# Altium PCB LTO 16S BMS.PcbDoc (part 1 of 2)
Units mm, origin at the board's own origin, x right, y up, seen from the top; angles counter-clockwise.
Board outline 100 x 100 mm, 4 copper layers (L1 - Primary, L2 - GND, L3 - GND, L4 - Secondary), stack 1.685 mm thick; 254 components, 145 nets, 666 pads, 230 vias.
Unrouted connection lines stored in the file: 137.
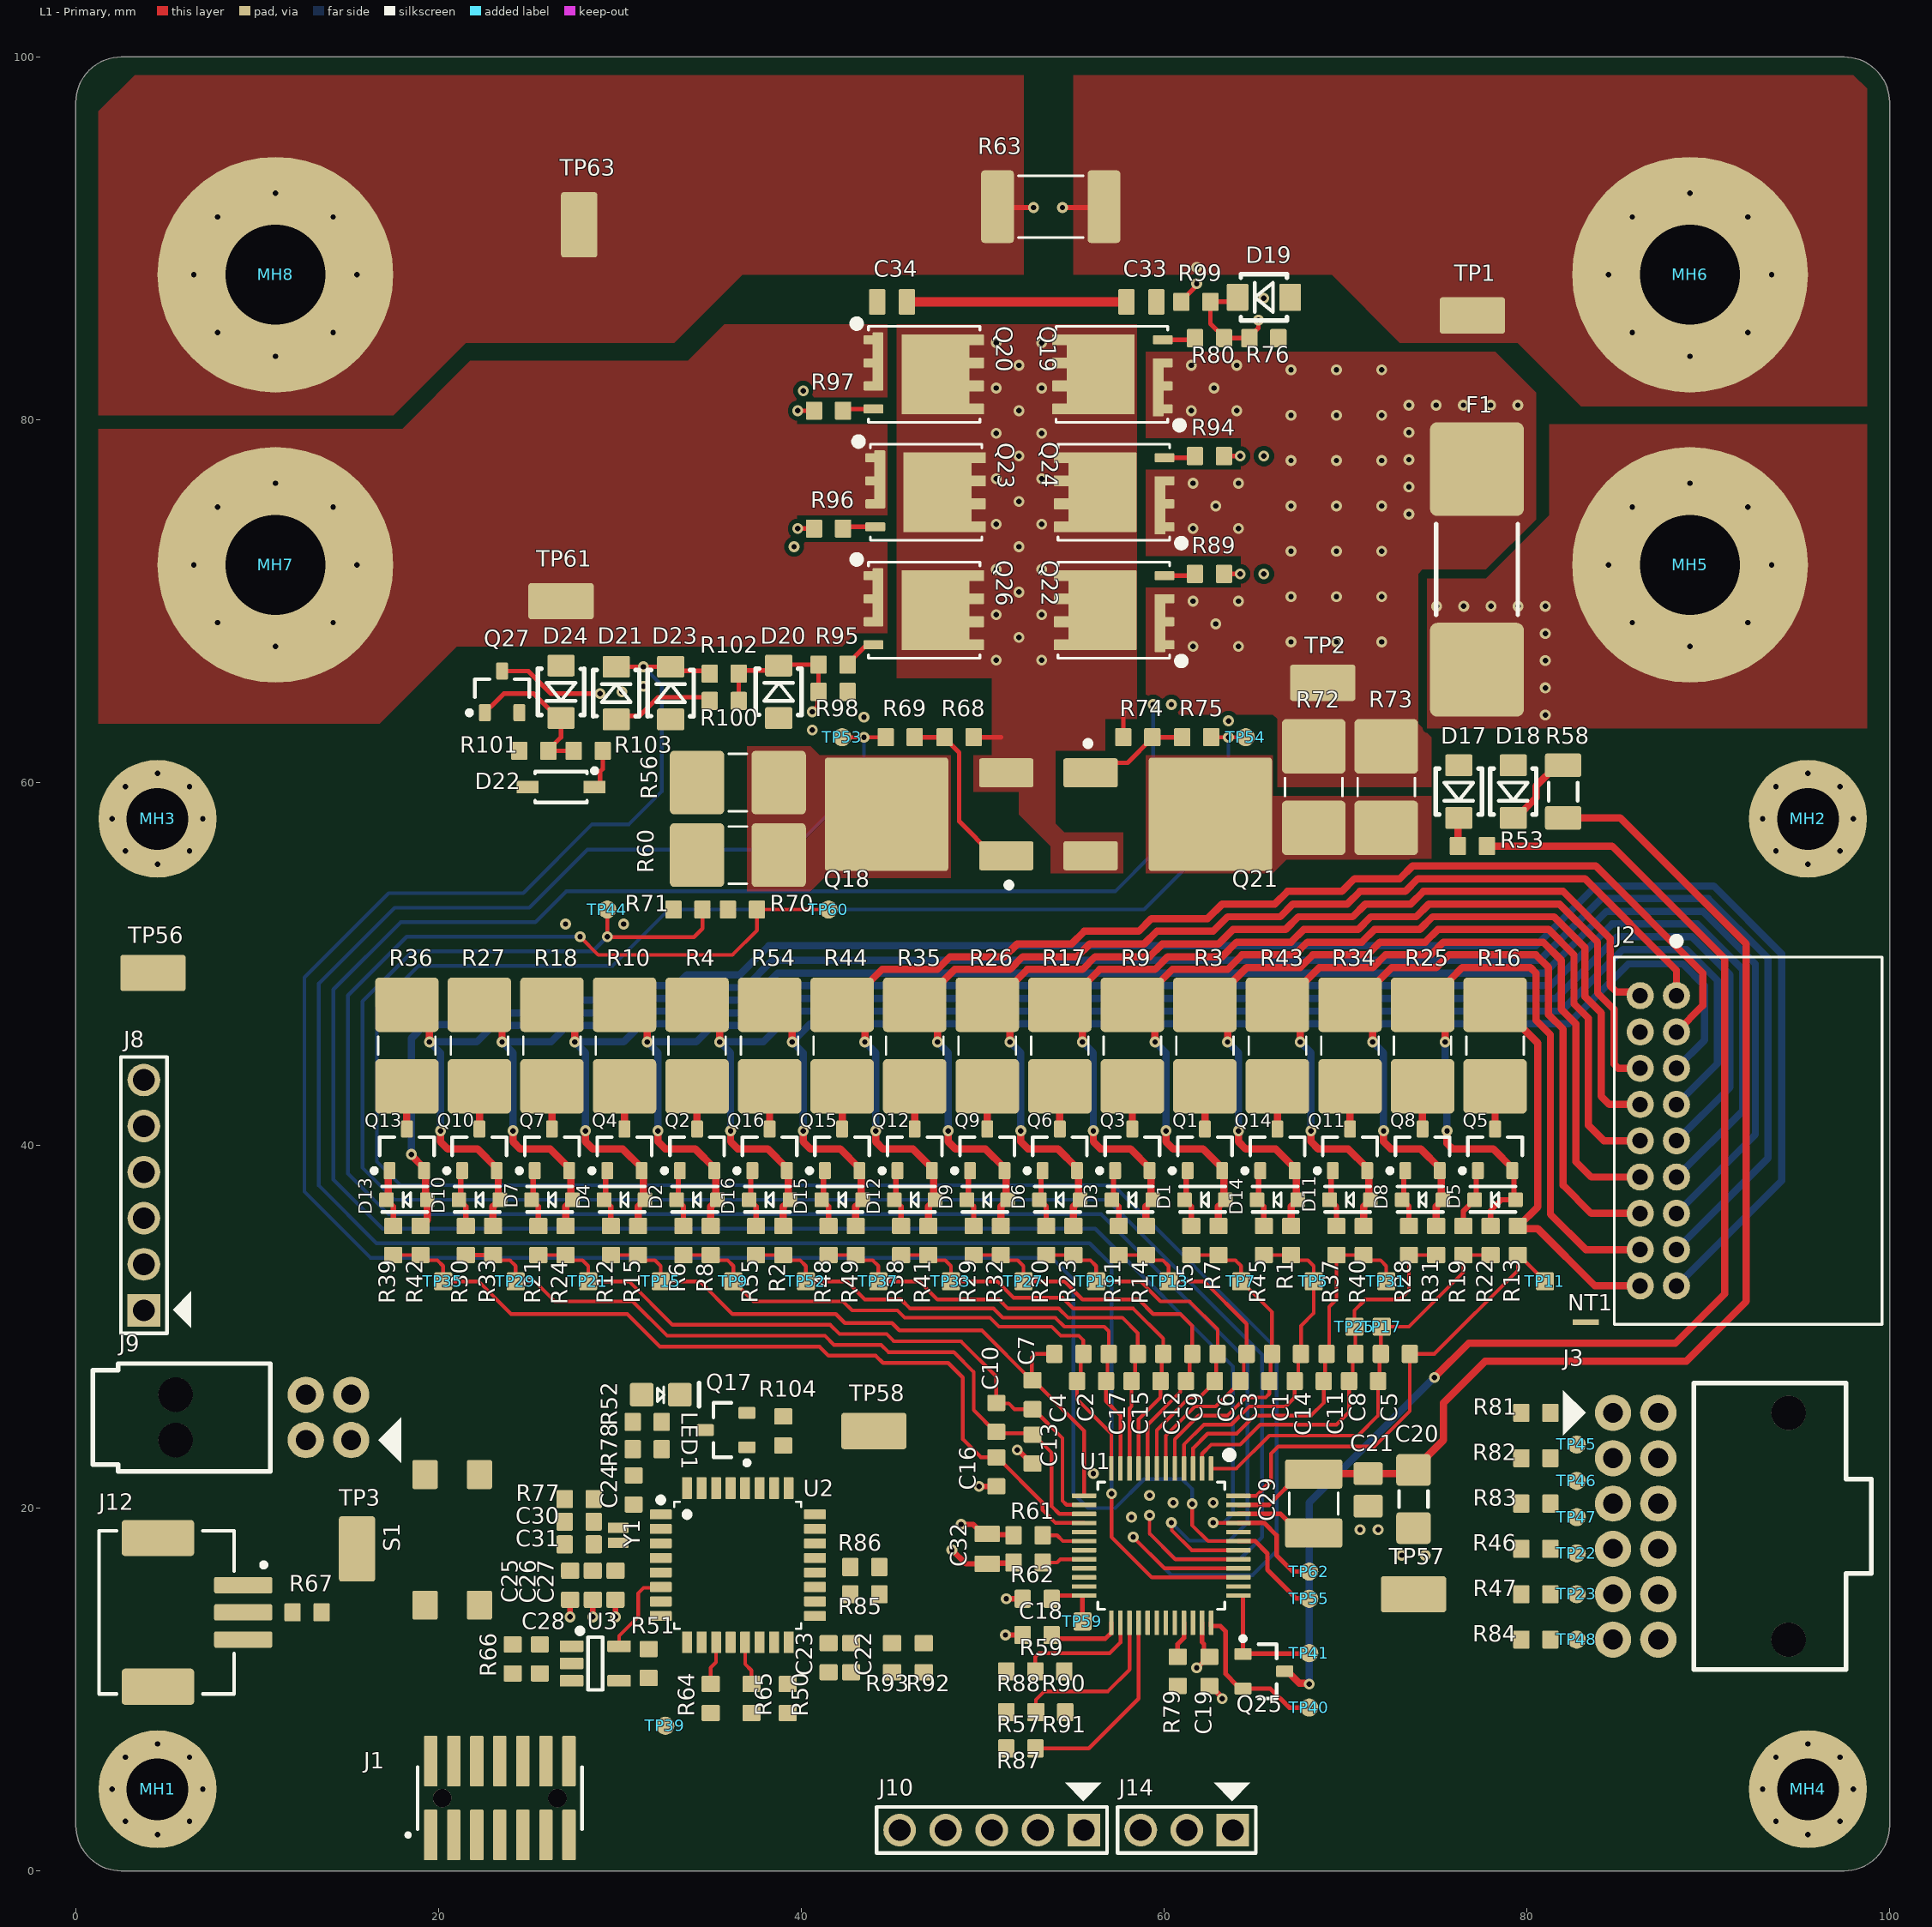
[diagram p0: L1 - Primary view]
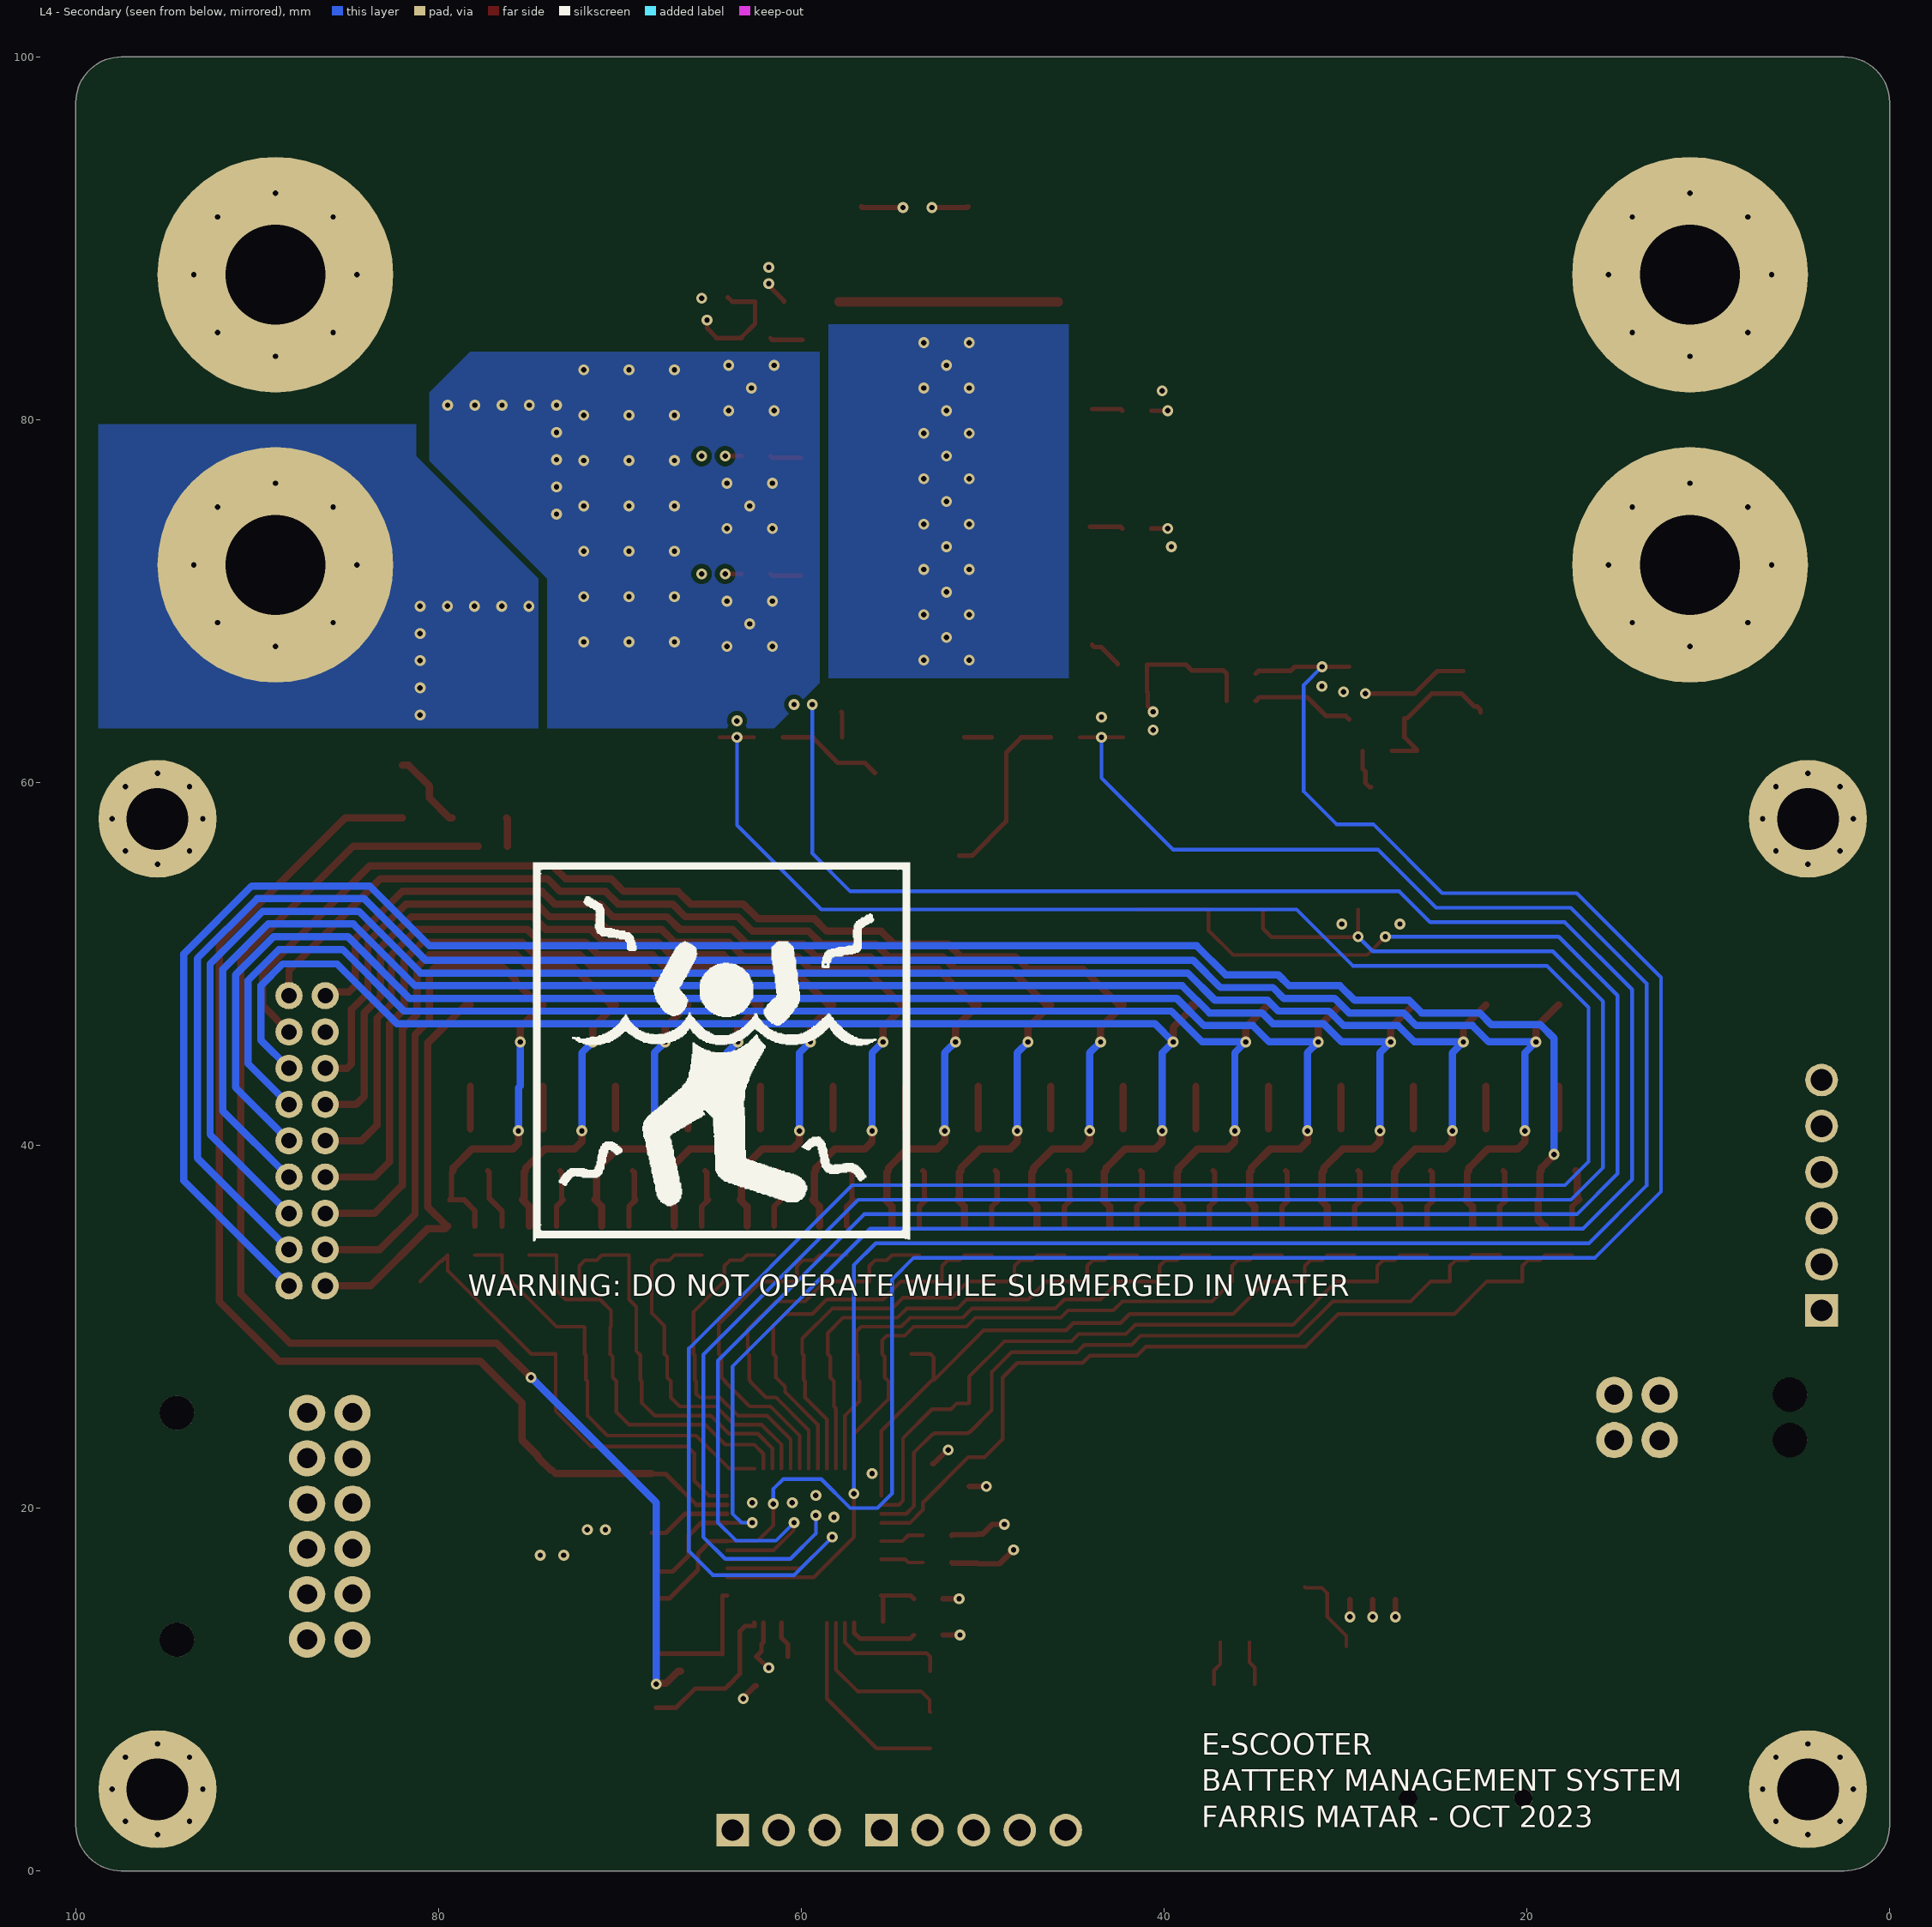
[diagram p1: L4 - Secondary view, seen from below]
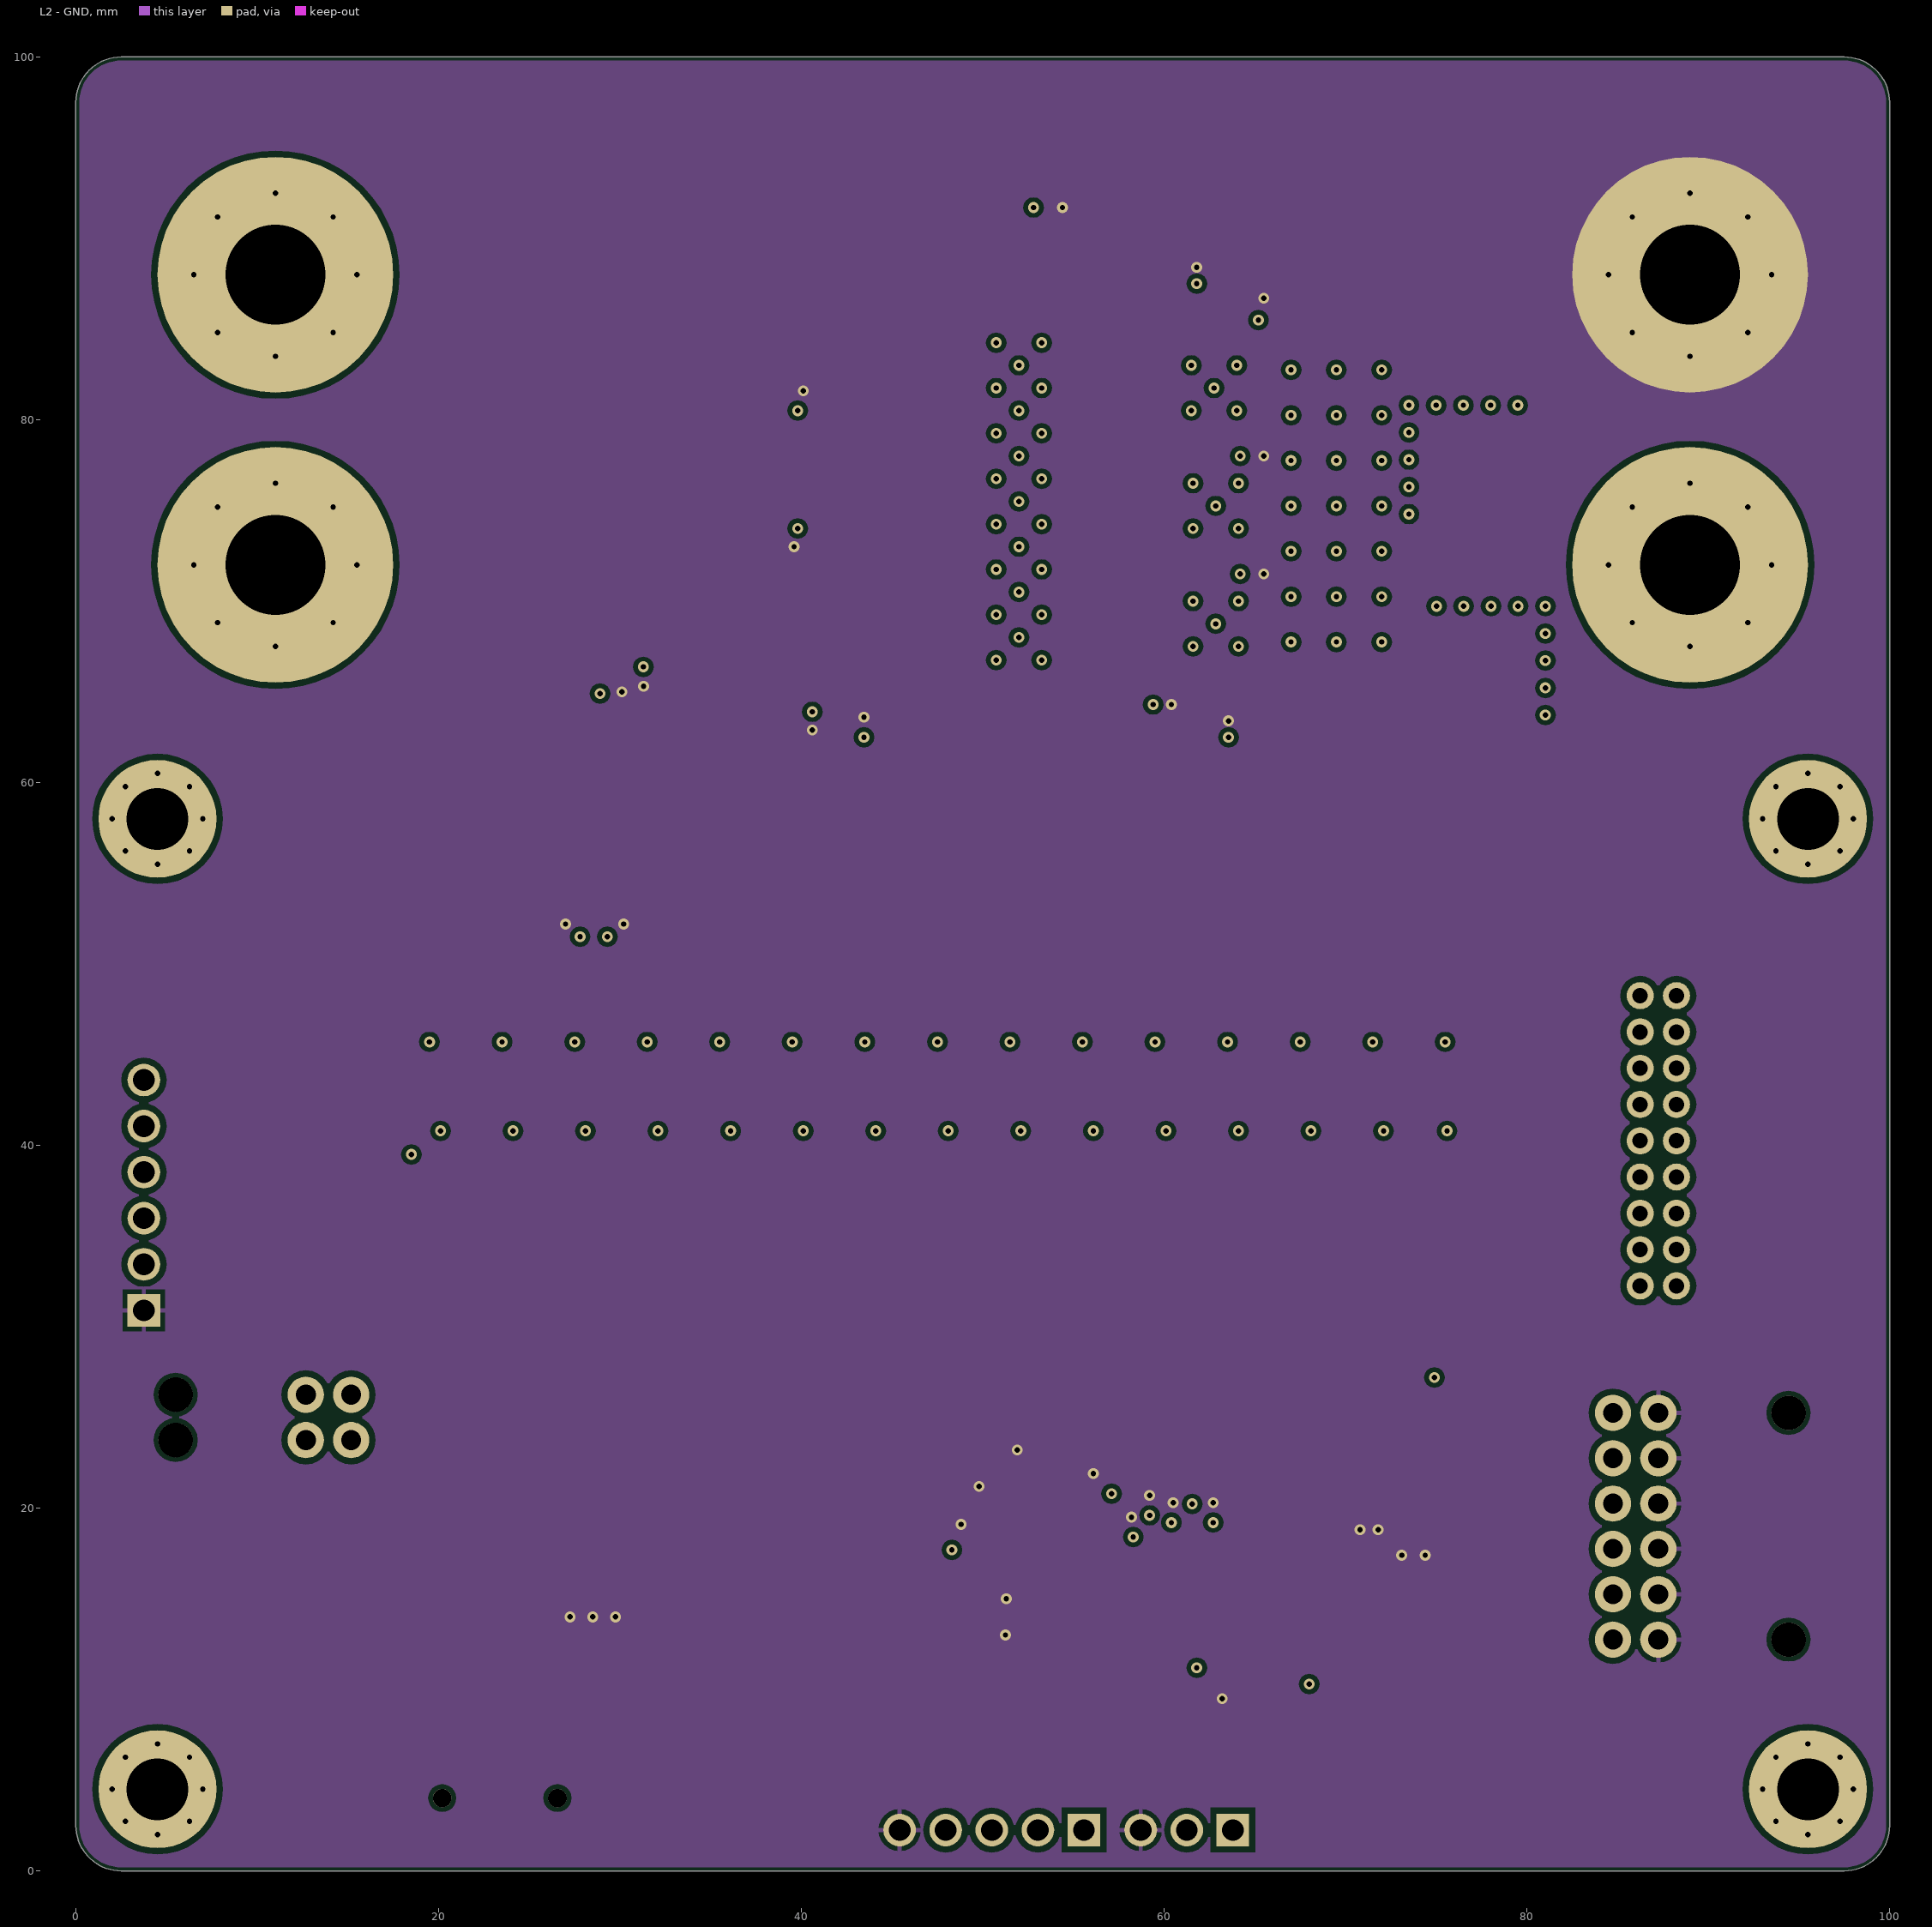
[diagram p2: L2 - GND]
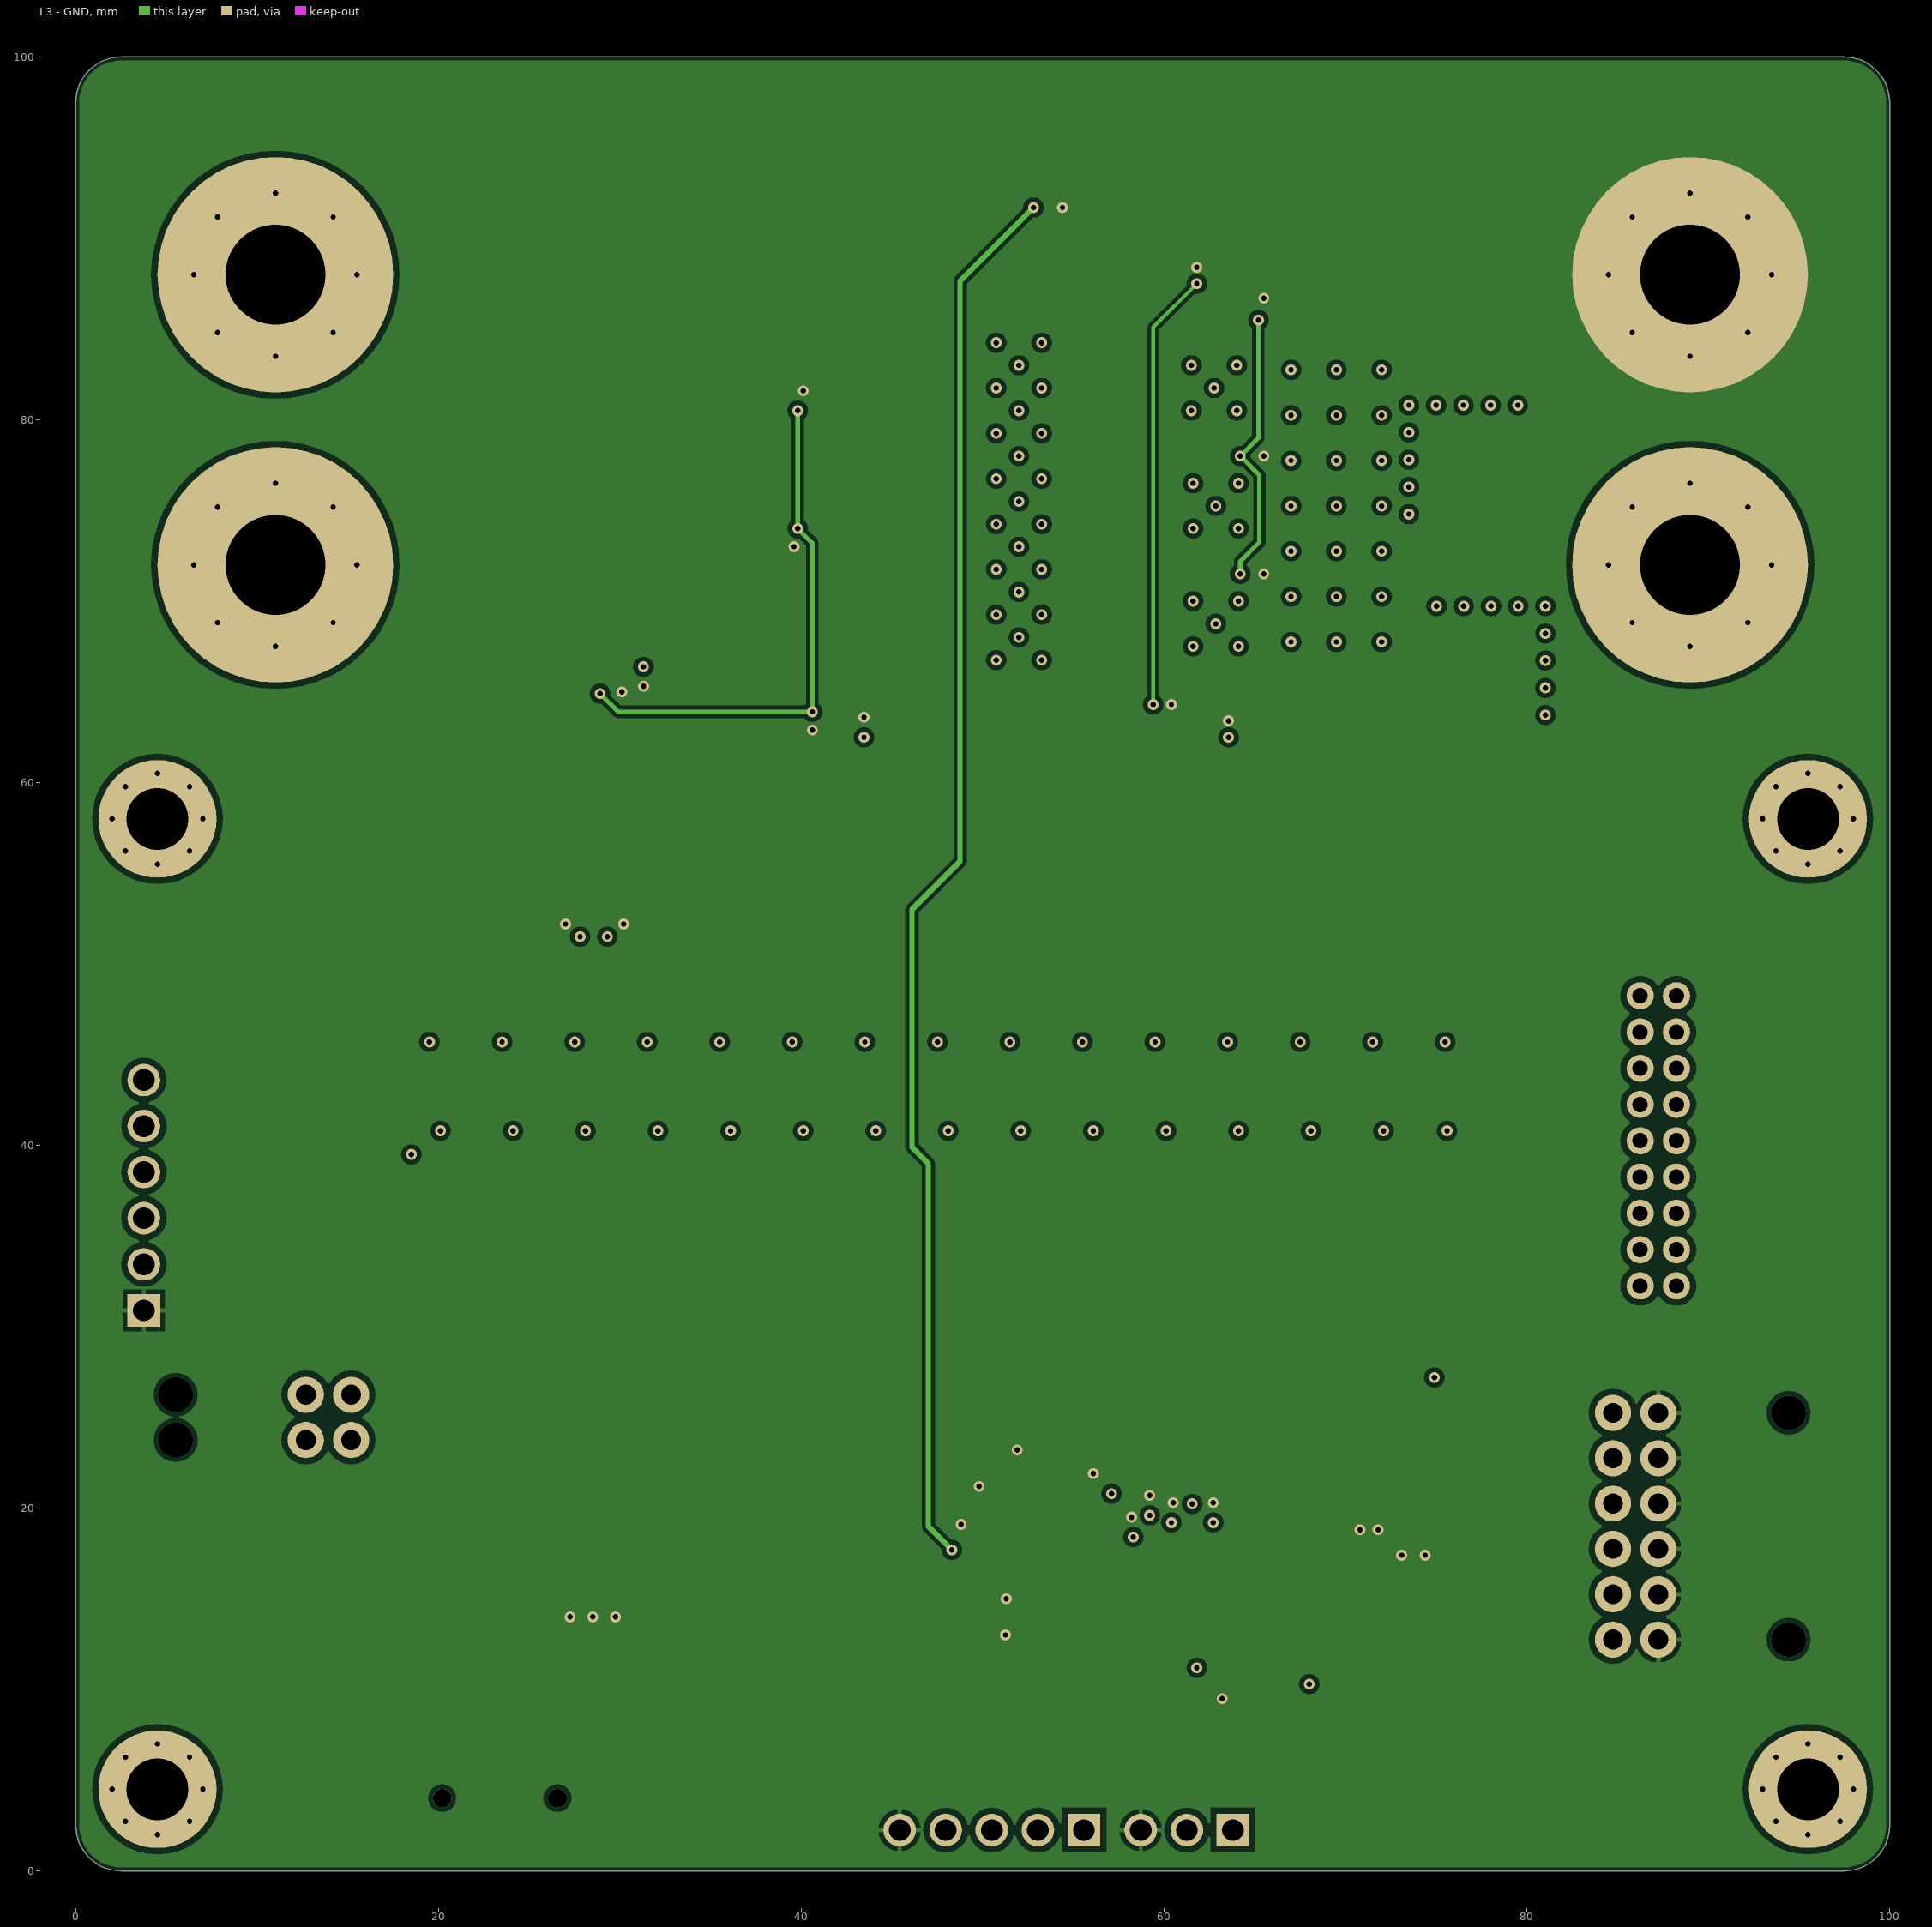
[diagram p3: L3 - GND]

## Layer stack, top to bottom
Top Solder: solder mask 0.0127, Solder Resist, Dk 3.8
L1 - Primary: signal copper 0.075
Dielectric 1: prepreg 0.2, 7628, Dk 4.6
L2 - GND: signal copper 0.035
Core: core 1.065, FR-4, Dk 4.5
L3 - GND: signal copper 0.035
Dielectric 2: prepreg 0.2, 7628, Dk 4.6
L4 - Secondary: signal copper 0.075
Bottom Solder: solder mask 0.0127, Solder Resist, Dk 3.8

## Board outline
0,2.5 0,97.5 cw(c2.5,97.5) 2.5,100 97.5,100 cw(c97.5,97.5) 100,97.5 100,2.5 cw(c97.5,2.5) 97.5,0 2.5,0 cw(c2.5,2.5)

## Design rules (kind name [scope] priority, off if disabled: settings)
BoardOutlineClearance [All] p1: gap=0.2 ignorepadtopadclearanceinfootprint=FALSE
Clearance ClearanceNetTie [HasFootprint('NET_TIE') vs HasFootprint('NET_TIE')] p1: gap=0 ignorepadtopadclearanceinfootprint=FALSE
Clearance ClearanceMidLayer1 [OnLayer('L2 - GND') Or IsVia Or IsThruPin vs OnLayer('L2 - GND')] p2: gap=0.2 ignorepadtopadclearanceinfootprint=FALSE except(0.25: SMDPad-Hole Fill-Hole Poly-Hole Region-Hole Text-Hole; 0.254: Arc-Via Arc-Hole Track-Via Track-Hole Via-Fill Via-Poly Via-Region Fill-Fill Fill-Poly Fill-Region Poly-Poly Poly-Region Region-Region; 0.33: Arc-THPad Track-THPad THPad-Fill THPad-Poly THPad-Region; 0.5: SMDPad-THPad THPad-THPad THPad-Via THPad-Hole Via-Via Via-Hole)
Clearance ClearanceMidLayer2 [OnLayer('L3 - GND') Or IsVia Or IsThruPin vs OnLayer('L3 - GND')] p3: gap=0.2 ignorepadtopadclearanceinfootprint=FALSE except(0.25: SMDPad-Hole Fill-Hole Poly-Hole Region-Hole Text-Hole; 0.254: Arc-Via Arc-Hole Track-Via Track-Hole Via-Fill Via-Poly Via-Region Fill-Fill Fill-Poly Fill-Region Poly-Poly Poly-Region Region-Region; 0.33: Arc-THPad Track-THPad THPad-Fill THPad-Poly THPad-Region; 0.5: SMDPad-THPad THPad-THPad THPad-Via THPad-Hole Via-Via Via-Hole)
Clearance ClearanceTopLayer [OnLayer('L1 - Primary') Or IsVia Or IsThruPin vs OnLayer('L1 - Primary') Or IsVia Or IsThruPin] p4: gap=0.2 ignorepadtopadclearanceinfootprint=FALSE except(0.25: SMDPad-Hole Fill-Hole Poly-Hole Region-Hole Text-Hole; 0.254: Arc-Via Arc-Hole Track-Via Track-Hole Via-Fill Via-Poly Via-Region Fill-Fill Fill-Poly Fill-Region Poly-Poly Poly-Region Region-Region; 0.33: Arc-THPad Track-THPad THPad-Fill THPad-Poly THPad-Region; 0.5: SMDPad-THPad THPad-THPad THPad-Via THPad-Hole Via-Via Via-Hole)
Clearance ClearanceBottomLayer [OnLayer('L4 - Secondary') Or IsVia Or IsThruPin vs OnLayer('L4 - Secondary') Or IsVia Or IsThruPin] p5: gap=0.2 ignorepadtopadclearanceinfootprint=FALSE except(0.25: SMDPad-Hole Fill-Hole Poly-Hole Region-Hole Text-Hole; 0.254: Arc-Via Arc-Hole Track-Via Track-Hole Via-Fill Via-Poly Via-Region Fill-Fill Fill-Poly Fill-Region Poly-Poly Poly-Region Region-Region; 0.33: Arc-THPad Track-THPad THPad-Fill THPad-Poly THPad-Region; 0.5: SMDPad-THPad THPad-THPad THPad-Via THPad-Hole Via-Via Via-Hole)
ComponentClearance [All] p1: gap=0.102 collisioncheckmode=3 verticalgap=0.102 showdistances=TRUE
DiffPairsRouting [All] p1: maxlimit=0.203 minlimit=0.102 mostfreqgap=0.203 toplayer_mingap=0.203 toplayer_minwidth=0.203 toplayer_maxwidth=1816.048 toplayer_prefwidth=0.203 midlayer1_maxgap=0.102 midlayer1_prefgap=0.102 midlayer1_minwidth=0.102 midlayer1_maxwidth=1816.048 midlayer1_prefwidth=0.102 midlayer2_maxgap=0.102 midlayer2_prefgap=0.102 midlayer2_minwidth=0.102 midlayer2_maxwidth=1816.048 midlayer2_prefwidth=0.102 bottomlayer_mingap=0.203 bottomlayer_minwidth=0.203 bottomlayer_maxwidth=1816.048 bottomlayer_prefwidth=0.203 maxuncoupledlength=12.7
Height [All] p1: minheight=0 maxheight=1816.048 prefheight=12.7
HoleSize [All] p1: absolutevalues=TRUE maxlimit=6.3 minlimit=0.2 maxpercent=80.000 minpercent=20.000
HoleToHoleClearance [All] p1: gap=0.25 allowstackedmicrovias=FALSE
MinimumAnnularRing [All] p1: minimumring=0.076
MinimumSolderMaskSliver [All] p1: minsoldermaskwidth=0.1
PolygonConnect PolygonConnect_1 [HasFootprint('TESTPOINT_CIRCLE_1MM') OR HasFootprint('TESTPOINT_SQUARE_1MM')] p1: connectstyle=Direct reliefconductorwidth=0.254 reliefentries=4 polygonreliefangle="90 Angle" airgapwidth=0.254
PolygonConnect [All] p2: thpad.connectstyle=Relief thpad.reliefconductorwidth=0.254 thpad.reliefentries=4 thpad.polygonreliefangle="90 Angle" thpad.airgapwidth=0.254 smdpad.connectstyle=Direct smdpad.reliefconductorwidth=0.254 smdpad.reliefentries=4 smdpad.polygonreliefangle="90 Angle" smdpad.airgapwidth=0.254 via.connectstyle=Direct via.reliefconductorwidth=0.254 via.reliefentries=4 via.polygonreliefangle="90 Angle" via.airgapwidth=0.254
RoutingVias [All] p1: holewidth=0.2 width=0.45 viastyle="Through Hole" minholewidth=0.2 minwidth=0.45 maxholewidth=6.3 maxwidth=6.55
ShortCircuit ShortCircuitNetTie [InNet('CELL_V0') vs InNet('VBAT-')] p1: allowed=TRUE
ShortCircuit [All] p2: allowed=FALSE
SilkToSilkClearance [All] p1: silktosilkclearance=0
SilkToSolderMaskClearance [IsPad] p1: minsilkscreentomaskgap=0.102 clearancetoexposedcopper=TRUE
SolderMaskExpansion [All] p1: expansion=0.075 istentingtop=FALSE
SupplyNets "Schematic Supply Nets_6" [InNet('VBAT+')] p1: voltage=0.000
SupplyNets "Schematic Supply Nets_5" [InNet('VPACK-')] p2: voltage=0.000
SupplyNets "Schematic Supply Nets_4" [InNet('VBAT-')] p3: voltage=0.000
SupplyNets "Schematic Supply Nets_3" [InNet('VPACK+')] p4: voltage=0.000
SupplyNets "Schematic Supply Nets_2" [InNet('1V8')] p5: voltage=0.000
SupplyNets "Schematic Supply Nets_1" [InNet('3V3')] p6: voltage=0.000
Width [All] p1: maxlimit=1816.048 minlimit=0.102 preferedwidth=0.203 toplayer_minwidth=0.203 midlayer1_prefwidth=0.102 midlayer2_prefwidth=0.102 bottomlayer_minwidth=0.203 minimp=50.000000 maximp=50.000000 favimp=50.000000
21 further rules are at their usual default settings.

## Classes and differential pairs
net class VC[0..16]: VC0 VC1 VC2 VC3 VC4 VC5 VC6 VC7 VC8 VC9 VC10 VC11 VC12 VC13 VC14 VC15 VC16
component class AFE: C18 C19 C20 C21 C29 C32 D17 D18 Q25 R53 R57 R58 R59 R61 R62 R63 R79 R87 R88 R90 R91 TP3 TP39 TP40 TP41 TP44 TP59 TP60 U1
net class CELL_V[0..16]: CELL_V0 CELL_V1 CELL_V2 CELL_V3 CELL_V4 CELL_V5 CELL_V6 CELL_V7 CELL_V8 CELL_V9 CELL_V10 CELL_V11 CELL_V12 CELL_V13 CELL_V14 CELL_V15 CELL_V16
component class Top: MH1 MH2 MH3 MH4
component class "Temperature Sense": J3 R46 R47 R81 R82 R83 R84 TP22 TP23 TP45 TP46 TP47 TP48
component class "STM32 MCU": C22 C23 C24 C25 C26 C27 C28 C30 C31 J1 J12 LED1 Q17 R50 R51 R52 R64 R65 R66 R67 R77 R78 R85 R86 R92 R93 R104 S1 U2 U3 Y1
component class "Pack Interface": J8 J9 J10 J14 MH7 MH8 TP61 TP63
component class "High Side FETs": C33 C34 D19 D20 D21 D22 D23 D24 Q18 Q19 Q20 Q21 Q22 Q23 Q24 Q26 Q27 R56 R60 R68 R69 R70 R71 R72 R73 R74 R75 R76 R80 R89 R94 R95 R96 R97 R98 R99 R100 R101 R102 R103 TP53 TP54 TP55 TP62
component class "Battery Interface": g J2 MH5 MH6 NT1 TP1 TP2 TP56 TP57 TP58
component class "Balancing FETs": C1 C2 C3 C4 C5 C6 C7 C8 C9 C10 C11 C12 C13 C14 C15 C16 C17 D1 D2 D3 D4 D5 D6 D7 D8 D9 D10 D11 D12 D13 D14 D15 D16 Q1 Q2 Q3 Q4 Q5 Q6 Q7 Q8 Q9 Q10 Q11 Q12 Q13 Q14 Q15 Q16 R1 R2 R3 R4 R5 R6 R7 R8 R9 R10 R11 R12 R13 R14 R15 R16 R17 R18 R19 R20 R21 R22 R23 R24 R25 R26 R27 R28 R29 R30 R31 R32 R33 R34 R35 R36 R37 R38 R39 R40 R41 R42 R43 R44 R45 R48 R49 R54 R55 TP5 TP7 TP9 TP11 TP13 TP15 TP17 TP19 TP21 TP25 TP27 TP29 TP31 TP33 TP35 TP37 TP52

## Components (designator, comment, footprint, x,y, rotation, side; value= is the part's Value field where it differs from the comment)
C1 "CAP_0.1uF_16V_0603" CAP0603 66.75,28.5 r0 top value=0.1μF
C2 "CAP_0.1uF_16V_0603" CAP0603 56,27 r0 top value=0.1μF
C3 "CAP_0.1uF_16V_0603" CAP0603 65,27 r0 top value=0.1μF
C4 "CAP_0.1uF_16V_0603" CAP0603 54.75,28.5 r0 top value=0.1μF
C5 "CAP_0.1uF_16V_0603" CAP0603 72.75,28.5 r0 top value=0.1μF
C6 "CAP_0.1uF_16V_0603" CAP0603 63.75,28.5 r0 top value=0.1μF
C7 "CAP_0.1uF_16V_0603" CAP0603 52.75,26.25 r90 top value=0.1μF
C8 "CAP_0.1uF_16V_0603" CAP0603 71,27 r0 top value=0.1μF
C9 "CAP_0.1uF_16V_0603" CAP0603 62,27 r0 top value=0.1μF
C10 "CAP_0.1uF_16V_0603" CAP0603 50.75,25 r90 top value=0.1μF
C11 "CAP_0.1uF_16V_0603" CAP0603 69.75,28.5 r0 top value=0.1μF
C12 "CAP_0.1uF_16V_0603" CAP0603 60.75,28.5 r0 top value=0.1μF
C13 "CAP_0.1uF_16V_0603" CAP0603 52.75,23.25 r90 top value=0.1μF
C14 "CAP_0.1uF_16V_0603" CAP0603 68,27 r0 top value=0.1μF
C15 "CAP_0.1uF_16V_0603" CAP0603 59,27 r0 top value=0.1μF
C16 "CAP_0.1uF_16V_0603" CAP0603 50.75,22 r90 top value=0.1μF
C17 "CAP_0.1uF_16V_0603" CAP0603 57.75,28.5 r0 top value=0.1μF
C18 "CAP_2.2uF_25V_0603" CAP0603 53,15 r0 top value=2.2μF
C19 "CAP_1uF_25V_0603" CAP0603 62.5,11 r90 top value=1μF
C20 "CAP_1uF_100V_1206" CAP1206 73.75,20.5 r90 top value=1μF
C21 "CAP_100pF_100V_0603" CAP2012 71.25,21 r90 top value=100pF
C22 "CAP_4.7uF_16V_0603" CAP0603 42.75,11.75 r90 top value=4.7μF
C23 "CAP_0.1uF_16V_0603" CAP0603 41.5,11.75 r90 top value=0.1μF
C24 "CAP_0.1uF_16V_0603" CAP0603 30.75,21 r270 top value=0.1μF
C25 "CAP_1uF_16V_0603" CAP0603 27.25,15.75 r90 top value=1μF
C26 "CAP_0.1uF_16V_0603" CAP0603 28.5,15.75 r90 top value=0.1μF
C27 "CAP_0.01uF_100V_0603" CAP0603 29.75,15.75 r90 top value=0.01μF
C28 "CAP_0.1uF_16V_0603" CAP0603 25.583,11.683 r90 top value=0.1μF
C29 "CAP_2.2uF_100V_1210" CAP1210 68.25,20.25 r270 top value=2.2μF
C30 "CAP_10pF_50V_0603" CAP0603 27.75,19.25 r0 top value=10pF
C31 "CAP_10pF_50V_0603" CAP0603 27.75,18 r0 top value=10pF
C32 "CAP_0.1uF_100V_0805" CAP0805 50.25,17.75 r270 top value=0.1µF
C33 "CAP_0.1uF_100V_0805" CAP0805 58.75,86.5 r180 top value=0.1µF
C34 "CAP_0.1uF_100V_0805" CAP0805 45,86.5 r180 top value=0.1µF
D1 "DIO_ZENER_3V3" DIO_ZENER_3V3 62.25,37 r180 top
D2 "DIO_ZENER_3V3" DIO_ZENER_3V3 34.25,37 r180 top
D3 "DIO_ZENER_3V3" DIO_ZENER_3V3 58.25,37 r180 top
D4 "DIO_ZENER_3V3" DIO_ZENER_3V3 30.25,37 r180 top
D5 "DIO_ZENER_3V3" DIO_ZENER_3V3 78.25,37 r180 top
D6 "DIO_ZENER_3V3" DIO_ZENER_3V3 54.25,37 r180 top
D7 "DIO_ZENER_3V3" DIO_ZENER_3V3 26.25,37 r180 top
D8 "DIO_ZENER_3V3" DIO_ZENER_3V3 74.25,37 r180 top
D9 "DIO_ZENER_3V3" DIO_ZENER_3V3 50.25,37 r180 top
D10 "DIO_ZENER_3V3" DIO_ZENER_3V3 22.25,37 r180 top
D11 "DIO_ZENER_3V3" DIO_ZENER_3V3 70.25,37 r180 top
D12 "DIO_ZENER_3V3" DIO_ZENER_3V3 46.25,37 r180 top
D13 "DIO_ZENER_3V3" DIO_ZENER_3V3 18.25,37 r180 top
D14 "DIO_ZENER_3V3" DIO_ZENER_3V3 66.25,37 r180 top
D15 "DIO_ZENER_3V3" DIO_ZENER_3V3 42.25,37 r180 top
D16 "DIO_ZENER_3V3" DIO_ZENER_3V3 38.25,37 r180 top
D17 "DIO_SCHOTTKY_100V_1A" SOD-123_FLAT 76.25,59.5 r90 top
D18 "DIO_SCHOTTKY_100V_1A" SOD-123_FLAT 79.25,59.5 r90 top
D19 "DIO_ZENER_16V" SOD-123_FLAT 65.5,86.75 r0 top
D20 "DIO_ZENER_16V" SOD-123_FLAT 38.75,65 r270 top
D21 "DIO_SCHOTTKY_100V_1A" SOD-123_FLAT 29.794,64.93 r270 top
D22 "DIO_100V_215mA" DIODSOD-123 26.75,59.75 r0 top
D23 "DIO_SCHOTTKY_100V_1A" SOD-123_FLAT 32.794,64.93 r270 top
D24 "DIO_ZENER_16V" SOD-123_FLAT 26.75,65 r90 top
F1 "FUSE_60A_LITTLEFUSE" FUSE_456SDE_LITTLEFUSE 77.25,71.75 r90 top
J1 "CON_SAMTEC-FTSH_7x2_SMD" "SAMTEC-FTSH 7x2 SMD" 23.375,4.011 r0 top
J2 "5018761840" "MOLEX-IGRID 9X2 THRA" 87.25,40.25 r90 top
J3 "1053141112" "MOLEX-NANOFIT 6x2 THRA" 86,19 r90 top
J8 "HEADER 6x1" HDR1X6 3.75,37.25 r90 top
J9 "0430450412" "MOLEX-NANOFIT 2x2 THRA" 13.93,25 r270 top
J10 "HEADER 5x1" HDR1X5 50.5,2.25 r180 top
J12 "CON_3M_SM_RA" MOLEX-5025850370 5,14.25 r270 top
J14 "HEADER 3x1" HDR1X3 61.25,2.25 r180 top
LED1 "LED_GREEN" LED_0805_GREEN 32.25,26.25 r0 top
MH1 "MOUNTING_HOLE_M3" MOUNTING_HOLE_3mm 4.5,4.5 r0 top
MH2 "MOUNTING_HOLE_M3" MOUNTING_HOLE_3mm 95.5,58 r0 top
MH3 "MOUNTING_HOLE_M3" MOUNTING_HOLE_3mm 4.5,58 r0 top
MH4 "MOUNTING_HOLE_M3" MOUNTING_HOLE_3mm 95.5,4.5 r0 top
MH5 "MOUNTING_HOLE_M5" MOUNTING_HOLE_5mm 89,72 r0 top
MH6 "MOUNTING_HOLE_M5" MOUNTING_HOLE_5mm 89,88 r0 top
MH7 "MOUNTING_HOLE_M5" MOUNTING_HOLE_5mm 11,72 r0 top
MH8 "MOUNTING_HOLE_M5" MOUNTING_HOLE_5mm 11,88 r0 top
NT1 "NetTie" NET_TIE 83.25,30.25 r0 top
Q1 "NMOS_20V_6A" SOT23-3 62.25,39.75 r90 top
Q2 "NMOS_20V_6A" SOT23-3 34.25,39.75 r90 top
Q3 "NMOS_20V_6A" SOT23-3 58.25,39.75 r90 top
Q4 "NMOS_20V_6A" SOT23-3 30.25,39.75 r90 top
Q5 "NMOS_20V_6A" SOT23-3 78.25,39.75 r90 top
Q6 "NMOS_20V_6A" SOT23-3 54.25,39.75 r90 top
Q7 "NMOS_20V_6A" SOT23-3 26.25,39.75 r90 top
Q8 "NMOS_20V_6A" SOT23-3 74.25,39.75 r90 top
Q9 "NMOS_20V_6A" SOT23-3 50.25,39.75 r90 top
Q10 "NMOS_20V_6A" SOT23-3 22.25,39.75 r90 top
Q11 "NMOS_20V_6A" SOT23-3 70.25,39.75 r90 top
Q12 "NMOS_20V_6A" SOT23-3 46.25,39.75 r90 top
Q13 "NMOS_20V_6A" SOT23-3 18.25,39.75 r90 top
Q14 "NMOS_20V_6A" SOT23-3 66.25,39.75 r90 top
Q15 "NMOS_20V_6A" SOT23-3 42.25,39.75 r90 top
Q16 "NMOS_20V_6A" SOT23-3 38.25,39.75 r90 top
Q17 "NMOS_20V_6A" SOT23-3 35.85,24.3 r180 top
Q18 "PMOS_60V_26A" "TO-252 AOSMD" 48,58.25 r90 top
Q19 "NMOS_60V_30A" INFINEON_8-POWERTDFN 57.15,82.5 r90 top
Q20 "NMOS_60V_30A" INFINEON_8-POWERTDFN 46.75,82.5 r270 top
Q21 "PMOS_60V_26A" "TO-252 AOSMD" 59.25,58.25 r270 top
Q22 "NMOS_60V_30A" INFINEON_8-POWERTDFN 57.25,69.5 r90 top
Q23 "NMOS_60V_30A" INFINEON_8-POWERTDFN 46.85,76 r270 top
Q24 "NMOS_60V_30A" INFINEON_8-POWERTDFN 57.25,76 r90 top
Q25 "NPN_100V_1A" SOT23-3 65.5,11 r0 top
Q26 "NMOS_60V_30A" INFINEON_8-POWERTDFN 46.75,69.5 r270 top
Q27 "NMOS_100V_170mA" SOT23-3 23.5,65 r90 top
R1 "RES_100Ω_0603_1%" RES0603 67,34.75 r270 top value=100Ω
R2 "RES_100Ω_0603_1%" RES0603 39,34.75 r270 top value=100Ω
R3 "RES_4.99Ω_2512_1%" RES2512 62.25,45.5 r90 top value=4.99Ω
R4 "RES_4.99Ω_2512_1%" RES2512 34.25,45.5 r90 top value=4.99Ω
R5 "RES_1kΩ_0603_1%" RES0603 61.5,34.75 r270 top value=1kΩ
R6 "RES_1kΩ_0603_1%" RES0603 33.5,34.75 r270 top value=1kΩ
R7 "RES_100Ω_0603_1%" RES0603 63,34.75 r270 top value=100Ω
R8 "RES_100Ω_0603_1%" RES0603 35,34.75 r270 top value=100Ω
R9 "RES_4.99Ω_2512_1%" RES2512 58.25,45.5 r90 top value=4.99Ω
R10 "RES_4.99Ω_2512_1%" RES2512 30.25,45.5 r90 top value=4.99Ω
R11 "RES_1kΩ_0603_1%" RES0603 57.5,34.75 r270 top value=1kΩ
R12 "RES_1kΩ_0603_1%" RES0603 29.5,34.75 r270 top value=1kΩ
R13 "RES_100Ω_0603_1%" RES0603 79.5,34.75 r270 top value=100Ω
R14 "RES_100Ω_0603_1%" RES0603 59,34.75 r270 top value=100Ω
R15 "RES_100Ω_0603_1%" RES0603 31,34.75 r270 top value=100Ω
R16 "RES_4.99Ω_2512_1%" RES2512 78.25,45.5 r90 top value=4.99Ω
R17 "RES_4.99Ω_2512_1%" RES2512 54.25,45.5 r90 top value=4.99Ω
R18 "RES_4.99Ω_2512_1%" RES2512 26.25,45.5 r90 top value=4.99Ω
R19 "RES_1kΩ_0603_1%" RES0603 76.5,34.75 r270 top value=1kΩ
R20 "RES_1kΩ_0603_1%" RES0603 53.5,34.75 r270 top value=1kΩ
R21 "RES_1kΩ_0603_1%" RES0603 25.5,34.75 r270 top value=1kΩ
R22 "RES_100Ω_0603_1%" RES0603 78,34.75 r270 top value=100Ω
R23 "RES_100Ω_0603_1%" RES0603 55,34.75 r270 top value=100Ω
R24 "RES_100Ω_0603_1%" RES0603 27,34.75 r270 top value=100Ω
R25 "RES_4.99Ω_2512_1%" RES2512 74.25,45.5 r90 top value=4.99Ω
R26 "RES_4.99Ω_2512_1%" RES2512 50.25,45.5 r90 top value=4.99Ω
R27 "RES_4.99Ω_2512_1%" RES2512 22.25,45.5 r90 top value=4.99Ω
R28 "RES_1kΩ_0603_1%" RES0603 73.5,34.75 r270 top value=1kΩ
R29 "RES_1kΩ_0603_1%" RES0603 49.5,34.75 r270 top value=1kΩ
R30 "RES_1kΩ_0603_1%" RES0603 21.5,34.75 r270 top value=1kΩ
R31 "RES_100Ω_0603_1%" RES0603 75,34.75 r270 top value=100Ω
R32 "RES_100Ω_0603_1%" RES0603 51,34.75 r270 top value=100Ω
R33 "RES_100Ω_0603_1%" RES0603 23,34.75 r270 top value=100Ω
R34 "RES_4.99Ω_2512_1%" RES2512 70.25,45.5 r90 top value=4.99Ω
R35 "RES_4.99Ω_2512_1%" RES2512 46.25,45.5 r90 top value=4.99Ω
R36 "RES_4.99Ω_2512_1%" RES2512 18.25,45.5 r90 top value=4.99Ω
R37 "RES_1kΩ_0603_1%" RES0603 69.5,34.75 r270 top value=1kΩ
R38 "RES_1kΩ_0603_1%" RES0603 45.5,34.75 r270 top value=1kΩ
R39 "RES_1kΩ_0603_1%" RES0603 17.5,34.75 r270 top value=1kΩ
R40 "RES_100Ω_0603_1%" RES0603 71,34.75 r270 top value=100Ω
R41 "RES_100Ω_0603_1%" RES0603 47,34.75 r270 top value=100Ω
R42 "RES_100Ω_0603_1%" RES0603 19,34.75 r270 top value=100Ω
R43 "RES_4.99Ω_2512_1%" RES2512 66.25,45.5 r90 top value=4.99Ω
R44 "RES_4.99Ω_2512_1%" RES2512 42.25,45.5 r90 top value=4.99Ω
R45 "RES_1kΩ_0603_1%" RES0603 65.5,34.75 r270 top value=1kΩ
R46 "RES_17.8kΩ_0603_1%" RES0603 80.5,17.75 r180 top value=17.8kΩ
R47 "RES_17.8kΩ_0603_1%" RES0603 80.5,15.25 r180 top value=17.8kΩ
R48 "RES_1kΩ_0603_1%" RES0603 41.5,34.75 r270 top value=1kΩ
R49 "RES_100Ω_0603_1%" RES0603 43,34.75 r270 top value=100Ω
R50 "RES_10kΩ_0603_1%" RES0603 39.25,9.5 r270 top value=10kΩ
R51 "RES_0Ω_0603" RES0603 31.583,11.433 r270 top value=0Ω
R52 "RES_604Ω_0603_1%" RES0603 31.5,24.75 r0 top value=604Ω
R53 "RES_300Ω_0603_1%" RES0603 77,56.5 r180 top value=300Ω
R54 "RES_4.99Ω_2512_1%" RES2512 38.25,45.5 r90 top value=4.99Ω
R55 "RES_1kΩ_0603_1%" RES0603 37.5,34.75 r270 top value=1kΩ
R56 "RES_1kΩ_2512_1%" RES2512 36.5,60 r180 top value=1kΩ
R57 "RES_33Ω_0603_1%" RES0603 52.1,8.75 r180 top value=33Ω
R58 "RES_100Ω_1206_1%" RES1206 82,59.5 r270 top value=100Ω
R59 "RES_10kΩ_0603_1%" RES0603 53,13 r180 top value=10kΩ
R60 "RES_1kΩ_2512_1%" RES2512 36.5,56 r180 top value=1kΩ
R61 "RES_100Ω_0603_1%" RES0603 52.5,18.5 r0 top value=100Ω
R62 "RES_100Ω_0603_1%" RES0603 52.5,17 r0 top value=100Ω
R63 "RES_1mΩ_2512_1%" RESC6532X75N 53.75,91.75 r180 top value=1mΩ
R64 "RES_33Ω_0603_1%" RES0603 35,9.5 r90 top value=33Ω
R65 "RES_33Ω_0603_1%" RES0603 37.25,9.5 r90 top value=33Ω
R66 "RES_17.8kΩ_0603_1%" RES0603 24.083,11.683 r270 top value=17.8kΩ
R67 "RES_1kΩ_0603_1%" RES0603 12.75,14.25 r180 top value=1kΩ
R68 "RES_10MΩ_0603_1%" RES0603 48.7,62.5 r180 top value=10MΩ
R69 "RES_5.1kΩ_0603_1%" RES0603 45.45,62.5 r0 top value=5.1kΩ
R70 "RES_10kΩ_0603_1%" RES0603 36.75,53 r180 top value=10kΩ
R71 "RES_10kΩ_0603_1%" RES0603 33.75,53 r180 top value=10kΩ
R72 "RES_1kΩ_2512_1%" RES2512 68.25,59.75 r270 top value=1kΩ
R73 "RES_1kΩ_2512_1%" RES2512 72.25,59.75 r270 top value=1kΩ
R74 "RES_10MΩ_0603_1%" RES0603 58.55,62.5 r180 top value=10MΩ
R75 "RES_5.1kΩ_0603_1%" RES0603 61.8,62.5 r180 top value=5.1kΩ
R76 "RES_10MΩ_0603_1%" RES0603 65.5,84.5 r0 top value=10MΩ
R77 "RES_10kΩ_0603_1%" RES0603 27.75,20.5 r0 top value=10kΩ
R78 "RES_10kΩ_0603_1%" RES0603 31.5,23.25 r0 top value=10kΩ
R79 "RES_10kΩ_0603_1%" RES0603 60.75,11 r90 top value=10kΩ
R80 "RES_51Ω_0603_1%" RES0603 62.5,84.5 r180 top value=51Ω
R81 "RES_17.8kΩ_0603_1%" RES0603 80.5,25.25 r180 top value=17.8kΩ
R82 "RES_17.8kΩ_0603_1%" RES0603 80.5,22.75 r180 top value=17.8kΩ
R83 "RES_17.8kΩ_0603_1%" RES0603 80.5,20.25 r180 top value=17.8kΩ
R84 "RES_17.8kΩ_0603_1%" RES0603 80.5,12.75 r180 top value=17.8kΩ
R85 "RES_33Ω_0603_1%" RES0603 43.5,15.25 r180 top value=33Ω
R86 "RES_33Ω_0603_1%" RES0603 43.5,16.75 r180 top value=33Ω
R87 "RES_0Ω_0603" RES0603 52.1,6.75 r180 top value=0Ω
R88 "RES_0Ω_0603" RES0603 52.1,11 r180 top value=0Ω
R89 "RES_51Ω_0603_1%" RES0603 62.5,71.5 r180 top value=51Ω
R90 "RES_0Ω_0603" RES0603 53.7,11 r0 top value=0Ω
R91 "RES_33Ω_0603_1%" RES0603 53.75,8.75 r0 top value=33Ω
R92 "RES_5.1kΩ_0603_1%" RES0603 46.75,11.75 r270 top value=5.1kΩ
R93 "RES_5.1kΩ_0603_1%" RES0603 45,11.75 r270 top value=5.1kΩ
R94 "RES_51Ω_0603_1%" RES0603 62.5,78 r180 top value=51Ω
R95 "RES_51Ω_0603_1%" RES0603 41.75,66.5 r0 top value=51Ω
R96 "RES_51Ω_0603_1%" RES0603 41.5,74 r0 top value=51Ω
R97 "RES_51Ω_0603_1%" RES0603 41.5,80.5 r0 top value=51Ω
R98 "RES_10MΩ_0603_1%" RES0603 41.75,65 r0 top value=10MΩ
R99 "RES_100Ω_0603_1%" RES0603 61.75,86.5 r0 top value=100Ω
R100 "RES_100Ω_0603_1%" RES0603 35.75,64.5 r0 top value=100Ω
R101 "RES_10MΩ_0603_1%" RES0603 25.25,61.75 r180 top value=10MΩ
R102 "RES_10kΩ_0603_1%" RES0603 35.75,66 r0 top value=10kΩ
R103 "RES_10kΩ_0603_1%" RES0603 28.25,61.75 r180 top value=10kΩ
R104 "RES_10kΩ_0603_1%" RES0603 39,24.25 r270 top value=10kΩ
S1 "SW_SPST_NO_4.5x4.5" SPST_PUSHBUTTON_TL3305AF260QG 20.75,18.25 r90 top
TP1 "TESTPOINT_SMD_LOOP" S1751-46R 77,85.75 r0 top
TP2 "TESTPOINT_SMD_LOOP" S1751-46R 68.75,65.5 r0 top
TP3 "TESTPOINT_SMD_LOOP" S1751-46R 15.5,17.75 r90 top
TP5 "TESTPOINT_1MM_SQUARE" TESTPOINT_SQUARE_1MM 68.25,32.5 r90 top
TP7 "TESTPOINT_1MM_SQUARE" TESTPOINT_SQUARE_1MM 64.25,32.5 r90 top
TP9 "TESTPOINT_1MM_SQUARE" TESTPOINT_SQUARE_1MM 36.25,32.5 r90 top
TP11 "TESTPOINT_1MM_SQUARE" TESTPOINT_SQUARE_1MM 81,32.5 r90 top
TP13 "TESTPOINT_1MM_SQUARE" TESTPOINT_SQUARE_1MM 60.25,32.5 r90 top
TP15 "TESTPOINT_1MM_SQUARE" TESTPOINT_SQUARE_1MM 32.25,32.5 r90 top
TP17 "TESTPOINT_1MM_SQUARE" TESTPOINT_SQUARE_1MM 72,30 r90 top
TP19 "TESTPOINT_1MM_SQUARE" TESTPOINT_SQUARE_1MM 56.25,32.5 r90 top
TP21 "TESTPOINT_1MM_SQUARE" TESTPOINT_SQUARE_1MM 28.25,32.5 r90 top
TP22 "TESTPOINT_1MM_CIRCLE" TESTPOINT_CIRCLE_1MM 82.75,17.5 r90 top
TP23 "TESTPOINT_1MM_CIRCLE" TESTPOINT_CIRCLE_1MM 82.75,15.25 r90 top
TP25 "TESTPOINT_1MM_SQUARE" TESTPOINT_SQUARE_1MM 70.5,30 r90 top
TP27 "TESTPOINT_1MM_SQUARE" TESTPOINT_SQUARE_1MM 52.25,32.5 r90 top
TP29 "TESTPOINT_1MM_SQUARE" TESTPOINT_SQUARE_1MM 24.25,32.5 r90 top
TP31 "TESTPOINT_1MM_SQUARE" TESTPOINT_SQUARE_1MM 72.25,32.5 r90 top
TP33 "TESTPOINT_1MM_SQUARE" TESTPOINT_SQUARE_1MM 48.25,32.5 r90 top
TP35 "TESTPOINT_1MM_SQUARE" TESTPOINT_SQUARE_1MM 20.25,32.5 r90 top
TP37 "TESTPOINT_1MM_SQUARE" TESTPOINT_SQUARE_1MM 44.25,32.5 r90 top
TP39 "TESTPOINT_1MM_CIRCLE" TESTPOINT_CIRCLE_1MM 32.5,8 r90 top
TP40 "TESTPOINT_1MM_CIRCLE" TESTPOINT_CIRCLE_1MM 68,9 r90 top
TP41 "TESTPOINT_1MM_CIRCLE" TESTPOINT_CIRCLE_1MM 68,12 r90 top
TP44 "TESTPOINT_1MM_CIRCLE" TESTPOINT_CIRCLE_1MM 29.3,53 r90 top
TP45 "TESTPOINT_1MM_CIRCLE" TESTPOINT_CIRCLE_1MM 82.75,23.5 r90 top
TP46 "TESTPOINT_1MM_CIRCLE" TESTPOINT_CIRCLE_1MM 82.75,21.5 r90 top
TP47 "TESTPOINT_1MM_CIRCLE" TESTPOINT_CIRCLE_1MM 82.75,19.5 r90 top
TP48 "TESTPOINT_1MM_CIRCLE" TESTPOINT_CIRCLE_1MM 82.75,12.75 r90 top
TP52 "TESTPOINT_1MM_SQUARE" TESTPOINT_SQUARE_1MM 40.25,32.5 r90 top
TP53 "TESTPOINT_1MM_CIRCLE" TESTPOINT_CIRCLE_1MM 42.25,62.5 r90 top
TP54 "TESTPOINT_1MM_CIRCLE" TESTPOINT_CIRCLE_1MM 64.5,62.5 r90 top
TP55 "TESTPOINT_1MM_CIRCLE" TESTPOINT_CIRCLE_1MM 68,15 r90 top
TP56 "TESTPOINT_SMD_LOOP" S1751-46R 4.25,49.5 r0 top
TP57 "TESTPOINT_SMD_LOOP" S1751-46R 73.75,15.25 r180 top
TP58 "TESTPOINT_SMD_LOOP" S1751-46R 44,24.25 r180 top
TP59 "TESTPOINT_1MM_SQUARE" TESTPOINT_SQUARE_1MM 55.5,13.75 r90 top
TP60 "TESTPOINT_1MM_CIRCLE" TESTPOINT_CIRCLE_1MM 41.5,53 r90 top
TP61 "TESTPOINT_SMD_LOOP" S1751-46R 26.75,70 r180 top
TP62 "TESTPOINT_1MM_CIRCLE" TESTPOINT_CIRCLE_1MM 68,16.5 r90 top
TP63 "TESTPOINT_SMD_LOOP" S1751-46R 27.75,90.75 r90 top
U1 "BQ76952PFBR" TI_48-TQFP 59.843,17.928 r270 top
U2 "STM32L412K8T6" STM-LQFP32 36.499,16.85 r0 top
U3 "LTC6905CS5#TRMPBF" SOT23-5 28.643,11.433 r0 top
Y1 "CRYSTAL_32.768KHZ" OSC_ECS-327TR-2 29.9,18.5 r270 top

## Footprints (in the part's own frame and the unit in brackets; to place one, negate y for a bottom-side part, rotate by r counter-clockwise, add the part's x,y. Pads: shape width x height; smd on the part's side, far side on the other; paste and mask are expansions set on the pad)
CAP0603 [mm]
  rrect20% 0.9x1 smd: 1(-0.8,0) 2(0.8,0)
  body extent -0.88,-0.48 0.87,0.47, height 0.87
CAP0805 [mm] "Chip Capacitor, Body 2.0x1.2mm, Height 0.45mm, IPC Medium Density"
  rrect15% 0.9x1.4 smd: 1(-0.825,0) 2(0.825,0)
  body extent -1.1,-0.73 1.1,0.72, height 1.39
CAP1206 [mm] "Chip Capacitor, Body 3.2x1.6mm, Height 0.55mm, IPC Medium Density"
  rrect20% 1.75x1.9 smd: 1(-1.6,0) 2(1.6,0)
  silkscreen extent -0.45,-0.8 0.45,0.8, body extent -1.7,-0.9 1.7,0.9, height 0.88
CAP1210 [mm]
  rrect15% 1.6x3.15 smd: 1(-1.625,0) 2(1.625,0)
  silkscreen extent -0.6,-1.35 0.6,1.35, body extent -1.7,-1.35 1.7,1.35, height 2.1
CAP2012 [mm]
  rrect20% 1.25x1.6 smd: 1(-0.895,0) 2(0.895,0)
  body extent -1.1,-0.7 1.1,0.75, height 1.41
DIO_ZENER_3V3 [mm] "DIODE ZENER 3.3V 200MW SOD323F"
  rrect15% 0.8x0.8 smd: 1(-1.125,0) 2(1.125,0)
  silkscreen extent -1.13,-0.72 1.38,0.67, body extent -1.12,-0.62 1.38,0.63, height 0.91
DIODSOD-123 [mm] "SOD-123, 2-Leads, Body 2.85x1.7mm (max), Pitch 3.7mm"
  rect 1.2x0.7 smd: 1(-1.85,0) 2(1.85,0)
  silkscreen extent -1.43,-0.85 1.97,1.02, body extent -1.42,-0.85 1.43,0.85, height 1.45
FUSE_456SDE_LITTLEFUSE [mm]
  rrect15% 5.175x5.175 smd mask+0.05: 1(-5.53,0) 2(5.53,0)
  silkscreen extent -2.5,-2.25 2.5,2.25, body extent -6.1,-2.25 6.1,2.25, height 4.5
HDR1X3 [mm] "Connector; Header; 3 Position"
  rect 1.8x1.8 hole 1.2: 1(-2.54,0)
  round 1.8 hole 1.2: 2(0,0) 3(2.54,0)
  silkscreen extent -3.81,-2.6 3.81,1.27, body extent -3.81,-1.27 3.81,1.27, height 8.57
HDR1X5 [mm] "Connector; Header; 5 Position"
  rect 1.8x1.8 hole 1.2: 1(-5.08,0)
  round 1.8 hole 1.2: 2(-2.54,0) 3(0,0) 4(2.54,0) 5(5.08,0)
  silkscreen extent -6.35,-2.6 6.35,1.27, body extent -6.35,-1.27 6.35,1.27, height 8.57
HDR1X6 [mm] "Connector; Header; 6 Position"
  rect 1.8x1.8 hole 1.2: 1(-6.35,0)
  round 1.8 hole 1.2: 2(-3.81,0) 3(-1.27,0) 4(1.27,0) 5(3.81,0) 6(6.35,0)
  silkscreen extent -7.62,-2.6 7.62,1.27, body extent -7.62,-1.27 7.62,1.27, height 8.57
INFINEON_8-POWERTDFN [mm]
  rrect25% 0.5x1.1 smd paste-2539.97 mask+0.05: 1(-1.905,-2.775) 2(-0.635,-2.775) 3(0.635,-2.775) 4(1.905,-2.775)
  rrect16% 3.2x0.6 smd paste-2539.97 mask+0.05: 3(-0.715,-2.525)
  rrect16% 0.6x1 smd paste-2539.97 mask+0.05: 5(1.905,2.825) 6(0.635,2.825) 7(-0.635,2.825) 8(-1.905,2.825)
  rrect2% 4.41x3.75 smd paste-2539.97 mask+0.05: 8(0,0.65)
  silkscreen extent -3,-3.9 2.65,3.1, body extent -2.67,-3.08 2.67,3.08, height 1.2
LED_0805_GREEN [mm] "SMD, 2-Leads, Body 2x1.25mm"
  rrect20% 1.3x1.3 smd: 1(-1.05,0) 2(1.05,0)
  silkscreen extent -0.18,-0.64 2.11,0.64, body extent -1,-0.62 1,0.63, height 1.12
MOLEX-5025850370 [mm]
  rrect20% 2x4 smd paste+0 mask+0.1: 0(-4.1,-0.475) 0(4.1,-0.475)
  rrect20% 0.9x3.2 smd paste+0 mask+0.1: 1(-1.5,4.225) 2(0,4.225) 3(1.5,4.225)
  silkscreen extent -4.5,-3.72 4.5,5.48, body extent -4.4,-3.67 4.4,4.83, height 6.4
"MOLEX-IGRID 9X2 THRA" [mm]
  round 1.5 hole 0.85 paste-2539.97 mask+0: 1(8,-1) 2(8,1) 3(6,-1) 4(6,1) 5(4,-1) 6(4,1) 7(2,-1) 8(2,1) 9(0,-1) 10(0,1) 11(-2,-1) 12(-2,1) 13(-4,-1) 14(-4,1) 15(-6,-1) 16(-6,1) 17(-8,-1) 18(-8,1)
  silkscreen extent -10.12,-12.33 11.21,2.43, body extent -10,-12.2 10,2.3, height 8.25
"MOLEX-NANOFIT 2x2 THRA" [mm]
  round 2 hole 1.1: 1(1.25,1.25) 2(-1.25,1.25) 3(1.25,-1.25) 4(-1.25,-1.25)
  round 1.9 hole 1.9 unplated mask+0.05: MH1(1.25,-8.43) MH2(-1.25,-8.43)
  silkscreen extent -2.97,-13 2.97,4, body extent -2.97,-13.07 2.97,1.59, height 9.15
"MOLEX-NANOFIT 6x2 THRA" [mm]
  round 2 hole 1.1: 1(6.25,1.25) 2(3.75,1.25) 3(1.25,1.25) 4(-1.25,1.25) 5(-3.75,1.25) 6(-6.25,1.25) 7(6.25,-1.25) 8(3.75,-1.25) 9(1.25,-1.25) 10(-1.25,-1.25) 11(-3.75,-1.25) 12(-6.25,-1.25)
  round 1.9 hole 1.9 unplated mask+0.05: MH1(6.25,-8.43) MH2(-6.25,-8.43)
  silkscreen extent -7.9,-13 7.9,4, body extent -7.97,-13.09 7.97,1.57, height 9.15
MOUNTING_HOLE_3mm [mm] "3mm Hole"
  round 6.5 hole 3.4: 0(0,0)
MOUNTING_HOLE_5mm [mm] "5mm Hole"
  round 13 hole 5.5: 0(0,0)
NET_TIE [mm]
  rect 0.75x0.3 smd paste-0.15 mask-2.5: 1(-0.35,0) 2(0.35,0)
OSC_ECS-327TR-2 [mm]
  rrect15% 0.575x1.14 smd mask+0.05: 1(-0.413,0) 2(0.413,0)
  body extent -0.6,-0.5 0.6,0.5, height 0.35
RES0603 [mm] "Chip Resistor, Body 1.6x0.8mm, IPC Medium Density"
  rrect15% 0.9x1 smd: 1(-0.8,0) 2(0.8,0)
  body extent -0.8,-0.4 0.8,0.4, height 0.46
RES1206 [mm] "Chip Resistor, Body 3.2x1.6mm, IPC Medium Density"
  rrect20% 1.3x2 smd: 1(-1.45,0) 2(1.45,0)
  silkscreen extent -0.5,-0.8 0.5,0.8, body extent -1.6,-0.8 1.6,0.8, height 0.61
RES2512 [mm]
  rrect15% 3x3.5 smd: 1(-2.25,0) 2(2.25,0)
  silkscreen extent -0.5,-1.58 0.5,1.58, body extent -3.13,-1.58 3.17,1.58, height 0.82
RESC6532X75N [mm]
  rrect20% 1.8x4 smd: 1(-2.935,0) 2(2.935,0)
  silkscreen extent -1.79,-1.7 1.79,1.7, body extent -3.17,-1.6 3.18,1.6, height 0.65
S1751-46R [mm] "SMD LOOP TESTPOINT"
  rrect15% 3.6x2 smd: 1(0,0)
  body extent -1.62,-0.85 1.63,0.8, height 2.01
"SAMTEC-FTSH 7x2 SMD" [mm] "Samtec programming header 14 positions"
  rrect15% 0.74x2.79 smd: 1(-3.81,-2.035) 2(-3.81,2.035) 3(-2.54,-2.035) 4(-2.54,2.035) 5(-1.27,-2.035) 6(-1.27,2.035) 7(0,-2.035) 8(0,2.035) 9(1.27,-2.035) 10(1.27,2.035) 11(2.54,-2.035) 12(2.54,2.035) 13(3.81,-2.035) 14(3.81,2.035)
  round 1.02 hole 1.02 unplated mask+0.051: ""(-3.175,0) ""(3.175,0)
  silkscreen extent -5.16,-2.13 4.53,1.72, body extent -4.44,-2.92 4.44,2.92, height 6.11
SOD-123_FLAT [mm]
  rrect15% 1.2x1.5 smd: 1(1.45,0) 2(-1.45,0)
  silkscreen extent -1.27,-1.27 1.27,1.27, body extent -1.93,-1.08 1.92,1.08, height 1.35
SOT23-3 [mm] "SOT23, 3-Leads, Body 2.90x2.30mm, Pitch 0.95mm, IPC Medium Density"
  rrect25% 0.95x0.65 smd: 1(-1.15,0.95) 2(-1.15,-0.95) 3(1.15,0)
  silkscreen extent -1.27,-1.5 0.7,1.92, body extent -1.3,-1.5 1.3,1.5, height 1.1
SOT23-5 [mm]
  rrect15% 1.3x0.63 smd: 1(-1.31,0.95) 2(-1.31,0) 3(-1.31,-0.95) 4(1.31,-0.95) 5(1.31,0.95)
  silkscreen extent -0.99,-1.45 0.4,1.94, body extent -1.4,-1.45 1.4,1.45, height 1.2
SPST_PUSHBUTTON_TL3305AF260QG [mm]
  rrect15% 1.6x1.4 smd: 1(-3.6,-1.5) 2(3.6,-1.5) 3(-3.6,1.5) 4(3.6,1.5)
  body extent -3.75,-2.25 3.75,2.25, height 3.7
STM-LQFP32 [mm]
  rrect15% 1.2x0.55 smd mask+0.05: 1(-4.25,2.8) 2(-4.25,2) 3(-4.25,1.2) 4(-4.25,0.4) 5(-4.25,-0.4) 6(-4.25,-1.2) 7(-4.25,-2) 8(-4.25,-2.8) 17(4.25,-2.8) 18(4.25,-2) 19(4.25,-1.2) 20(4.25,-0.4) 21(4.25,0.4) 22(4.25,1.2) 23(4.25,2) 24(4.25,2.8)
  rrect15% 0.55x1.2 smd mask+0.05: 9(-2.8,-4.25) 10(-2,-4.25) 11(-1.2,-4.25) 12(-0.4,-4.25) 13(0.4,-4.25) 14(1.2,-4.25) 15(2,-4.25) 16(2.8,-4.25) 25(2.8,4.25) 26(2,4.25) 27(1.2,4.25) 28(0.4,4.25) 29(-0.4,4.25) 30(-1.2,4.25) 31(-2,4.25) 32(-2.8,4.25)
  silkscreen extent -4.4,-3.5 3.5,3.75, body extent -4.5,-4.5 4.5,4.5, height 1.6
TESTPOINT_CIRCLE_1MM [mm]
  round 1 smd paste-2539.97: 1(0,0)
TESTPOINT_SQUARE_1MM [mm]
  rrect20% 1x1 smd paste-2539.97: 1(0,0)
TI_48-TQFP [mm]
  rrect25% 1.35x0.25 smd mask+0.05: 1(-4.25,2.75) 2(-4.25,2.25) 3(-4.25,1.75) 4(-4.25,1.25) 5(-4.25,0.75) 6(-4.25,0.25) 7(-4.25,-0.25) 8(-4.25,-0.75) 9(-4.25,-1.25) 10(-4.25,-1.75) 11(-4.25,-2.25) 12(-4.25,-2.75) 25(4.25,-2.75) 26(4.25,-2.25) 27(4.25,-1.75) 28(4.25,-1.25) 29(4.25,-0.75) 30(4.25,-0.25) 31(4.25,0.25) 32(4.25,0.75) 33(4.25,1.25) 34(4.25,1.75) 35(4.25,2.25) 36(4.25,2.75)
  rrect25% 0.25x1.35 smd mask+0.05: 13(-2.75,-4.25) 14(-2.25,-4.25) 15(-1.75,-4.25) 16(-1.25,-4.25) 17(-0.75,-4.25) 18(-0.25,-4.25) 19(0.25,-4.25) 20(0.75,-4.25) 21(1.25,-4.25) 22(1.75,-4.25) 23(2.25,-4.25) 24(2.75,-4.25) 37(2.75,4.25) 38(2.25,4.25) 39(1.75,4.25) 40(1.25,4.25) 41(0.75,4.25) 42(0.25,4.25) 43(-0.25,4.25) 44(-0.75,4.25) 45(-1.25,4.25) 46(-1.75,4.25) 47(-2.25,4.25) 48(-2.75,4.25)
  silkscreen extent -5.2,-3.5 3.5,3.95, body extent -4.5,-4.5 4.5,4.5, height 1.05
"TO-252 AOSMD" [mm]
  rrect15% 1.6x3 smd: 1(-2.286,-3.3) 3(2.286,-3.3)
  rrect5% 6.25x6.8 smd: 2(0,3.3)
  silkscreen extent -4.05,-3.59 -3.75,-3.3, body extent -3.36,-4.21 3.36,6.21, height 2.39

## Part data
C1 C2 C3 C4 C5 C6 C7 C8 C9 C10 C11 C12 C13 C14 C15 C16 C17 C23 C24 C26 C28: "CAP CER 0.1UF 16V X7R 0603", Dielectric=X7R, Manufacturer 1=Yageo, Manufacturer Part Number 1=CC0603KRX7R7BB104, Package=0603, Supplier Part Number 1=311-1088-1-ND, Voltage Rating=16V, Supplier 1=Digi-Key
C18: "CAP CER 2.2UF 25V X5R 0603", Dielectric=5, Manufacturer 1="TDK Corporation", Manufacturer Part Number 1=C1608X5R1E225K080AB, Supplier Part Number 1=445-5964-1-ND, Voltage Rating=25V, Supplier 1=Digi-Key
C19: "CAP CER 1UF 25V X5R 0603", Dielectric=X5R, Manufacturer 1=Samsung, Manufacturer Part Number 1=CL10A105KA8NNNC, Package=0603, Supplier Part Number 1=1276-1102-1-ND, Voltage Rating=25V, Mounting Type=SMD, Supplier 1=Digi-Key
C20: "CAP CER 1UF 100V X7R 1206", Package=1206, Supplier Part Number 1=490-16468-1-ND, Voltage Rating=100V, Mounting Type=SMD, Supplier 1=Digi-Key
C21: "CAP CER 100PF 100V X7R 0603", Dielectric=X7R, Manufacturer 1=YAGEO, Manufacturer Part Number 1=CC0603KRX7R0BB101, Package/Footprint=0603, Supplier Part Number 1=311-4048-1-ND, Voltage Rating=100V, Mounting Type=SMD, Supplier 1=Digi-Key
C22: "CAP CER 4.7UF 16V X6S 0603", Dielectric=X6S, Manufacturer 1="Murata Electronics", Manufacturer Part Number 1=GRM188C81C475KE11D, Package=0603, Supplier Part Number 1=490-13362-1-ND, Voltage Rating=16V, Mounting Type=SMD, Supplier 1=Digi-Key
C25: "CAP CER 1UF 16V X7R 0603", Dielectric=X7R, Manufacturer 1=Yageo, Manufacturer Part Number 1=CC0603KPX7R7BB105, Package=0603, Supplier Part Number 1=13-CC0603KPX7R7BB105CT-ND, Voltage Rating=16V, Mounting Type=SMD, Supplier 1=Digi-Key
C27: "CAP CER 0.01uF 100V X7R 0603", Dielectric=X7R, Manufacturer 1="Murata Electronics", Manufacturer Part Number 1=GCM188R72A103KA37J, Supplier Part Number 1=490-8028-1-ND, Voltage Rating=100V, Supplier 1=Digi-Key
C29: "CAP CER 2.2UF 100V X7R 1210", Dielectric=X7R, Manufacturer 1="Taiyo Yuden", Manufacturer Part Number 1=HMK325B7225KMHP, Supplier Part Number 1=587-5396-1-ND, Voltage Rating=100V, Supplier 1=Digi-Key
C30 C31: "CAP CER 10PF 50V X7R 0603", Manufacturer 1=KEMET, Manufacturer Part Number 1=C0603C100J5RAC7867, Package=0603, Supplier Part Number 1=399-C0603C100J5RAC7867CT-ND, Voltage Rating=50V, Supplier 1=Digi-Key
C32 C33 C34: "CAP CER 0.1UF 100V X7R 0805", Manufacturer 1="TDK Corporation", Manufacturer Part Number 1=C2012X7R2A104K125AA, Package=0805, Supplier Part Number 1=445-1418-1-ND, Voltage Rating=100V, Supplier 1=Digi-Key
D1 D2 D3 D4 D5 D6 D7 D8 D9 D10 D11 D12 D13 D14 D15 D16: "DIODE ZENER 3.3V 200mW SOD323F", Forward Voltage=1V, Manufacturer 1="ON Semiconductor / Fairchild", Manufacturer Part Number 1=MM3Z3V3B, Package/Case=SOD323F, Supplier Part Number 1=MM3Z3V3BCT-ND, Working Voltage=3.3V, Supplier 1=Digi-Key
D17 D18 D21 D23: "DIODE SCHOTTKY 100V 1A SOD-123F", Manufacturer 1="SMC Diode Solutions", Manufacturer Part Number 1=DSS110U, Package/Footprint=SOD-123F, Supplier Part Number 1=1655-DSS110UCT-ND, Mounting Type=SMD, Supplier 1=Digi-Key, Vr (Max)=100V
D19 D20 D24: "DIODE ZENER 16V 500MW SOD123", Forward Voltage=900mV, Manufacturer 1="Diodes Incorporated", Manufacturer Part Number 1=DDZ9703-7, Supplier Part Number 1=DDZ9703-7DICT-ND, Supplier 1=Digi-Key
D22: "DIODE GEN PURP 100V 215MA SOD123", Manufacturer 1=Nexperia, Manufacturer Part Number 1=BAS16GW, Package=SOD-123, Supplier Part Number 1=1727-7320-1-ND, Mounting Type=SMD, Package/Footprint=SOD-123, Supplier 1=Digi-Key, Verified=No
F1: "FUSE BRD MT 60A 250VAC 80VDC SMD", Current Rating=60A, Manufacturer 1="Littelfuse Inc.", Manufacturer Part Number 1=0456060.DRSDE, Supplier Part Number 1=18-0456060.DRSDECT-ND, Mounting Type=SMD, Supplier 1=Digi-Key, Verified=No
J1: "CONN HEADER SMD 14POS 1.27MM", Manufacturer 1=Samtec, Manufacturer Part Number 1=FTSH-107-01-L-DV-K-A, Supplier Part Number 1=FTSH-107-01-L-DV-K-A-ND, Mounting Type=SMD, Pitch=1.27mm, Supplier 1=Digi-Key
J2: library part CON_MOLEX-IGRID_9x2_THRA, "CONN HEADER R/A 18POS 2MM", Current Rating=7.5A, Manufacturer 1=Molex, Supplier Part Number 1=WM12314-ND, Voltage Rating=250V, Manufacturer Part Number 1=5018761840, Pitch=2mm, Supplier 1=Digi-Key
J3: library part CON_MOLEX-NANOFIT_6x2_THRA, "CONN HEADER R/A 12POS 2.5MM", Current Rating=15A, Manufacturer 1=Molex, Supplier Part Number 1=WM16911-ND, Voltage Rating=400V, Manufacturer Part Number 1=1053141112, Pitch=3.5mm, Supplier 1=Digi-Key
J8: "CONN HEADER VERT 6POS 2.54MM", Manufacturer 1="Würth Elektronik", Manufacturer Part Number 1=61300611121, Supplier Part Number 1=732-5319-ND, Mounting Type=TH, Pitch=2.54mm, Supplier 1=Digi-Key
J9: library part CON_MOLEX-NANOFIT_2x2_THRA, "CONN HEADER R/A 4POS 2.5MM", Current Rating=7.5A, Manufacturer 1=Molex, Manufacturer Part Number 1=1053141104, Supplier Part Number 1=WM16907-ND, Voltage Rating=250V, Pitch=2.5mm, Supplier 1=Digi-Key
J10: "CONN HEADER VERT 5POS 2.54MM", Manufacturer 1="Würth Elektronik", Manufacturer Part Number 1=61300511121, Supplier Part Number 1=732-5318-ND, Mounting Type=TH, Pitch=2.54mm, Supplier 1=Digi-Key
J12: "CONN RCPT 3POS 0.059 TIN SMD R/A", Current Rating=2A, Manufacturer 1=Molex, Manufacturer Part Number 1=5025850370, Package/Footprint=SMD, Supplier Part Number 1=WM12831CT-ND, Voltage Rating=100V, Family=CLIK-Mate, Mounting Type=SMD, Orientation="Right Angle", Pitch=1.5mm, Supplier 1=Digi-Key
J14: "CONN HEADER VERT 3POS 2.54MM", Manufacturer 1="Würth Elektronik", Manufacturer Part Number 1=61300311121, Supplier Part Number 1=732-5316-ND, Mounting Type=TH, Pitch=2.54mm, Supplier 1=Digi-Key
LED1: "LED GREEN DIFFUSED 0805 SMD", Forward Voltage Drop=2.2V, Manufacturer 1=OSRAM, Manufacturer Part Number 1="LG R971-KN-1", Package/Footprint=0805, Supplier Part Number 1=475-1410-1-ND, Mounting Type=SMD, Supplier 1=Digi-Key
Q1 Q2 Q3 Q4 Q5 Q6 Q7 Q8 Q9 Q10 Q11 Q12 Q13 Q14 Q15 Q16 Q17: library part NMOS_20V_2.6A, "MOSFET N-CH 20V 2.6A SOT23-3", Manufacturer 1="Vishay Siliconix", Manufacturer Part Number 1=SI2302CDS-T1-E3, Package/Footprint=SOT-23-3, Supplier Part Number 1=SI2302CDS-T1-E3CT-ND, Supplier 1=Digi-Key
Q18 Q21: "MOSFET P-CH 60V 26A TO252", Manufacturer 1="Alpha & Omega Semiconductor Inc.", Manufacturer Part Number 1=AOD409, Supplier Part Number 1=785-1103-1-ND, Id=26A, Mounting Type=SMD, Supplier 1=Digi-Key, Vdss=60V, Vgs (Max)=±20V
Q19 Q20 Q22 Q23 Q24 Q26: "MOSFET N-CH 60V 30A/100A TDSON7", Manufacturer 1="Infineon Technologies", Manufacturer Part Number 1=BSC014N06NSATMA1, Power Dissipation (Max)=2.5W, Supplier Device Package=8-PowerTDFN, Supplier Part Number 1=BSC014N06NSATMA1CT-ND, FET Type=N-Channel, Id=30A, Supplier 1=Digi-Key, Vdss=60V, Vgs (Max)=20V
Q25: "TRANS NPN 100V 1A SOT23-3", Manufacturer 1="Diodes Incorporated", Manufacturer Part Number 1=FMMT493TA, Package=SOT-23-3, Supplier Part Number 1=FMMT493CT-ND, Supplier 1=Digi-Key
Q27: "MOSFET N-CH 100V 170MA SOT23-3", Manufacturer 1="Diodes Incorporated", Manufacturer Part Number 1=BSS123-7-F, Supplier Part Number 1=BSS123-FDICT-ND, Supplier 1=Digi-Key
R1 R2 R7 R8 R13 R14 R15 R22 R23 R24 R31 R32 R33 R40 R41 R42 R49 R61 R62 R99 R100: "RES 100 OHM 1% 1/10W 0603", Manufacturer 1=Yageo, Manufacturer Part Number 1=RC0603FR-07100RL, Supplier Part Number 1=311-100HRCT-ND, Supplier 1=Digi-Key
R3 R4 R9 R10 R16 R17 R18 R25 R26 R27 R34 R35 R36 R43 R44 R54: "RES 4.99 OHM 1% 2W 2512", Manufacturer 1="Stackpole Electronics Inc", Manufacturer Part Number 1=RHC2512FT4R99, Supplier Part Number 1=RHC2512FT4R99CT-ND, Supplier 1=Digi-Key
R5 R6 R11 R12 R19 R20 R21 R28 R29 R30 R37 R38 R39 R45 R48 R55 R67: "RES 1K OHM 1% 1/8W 0603", Manufacturer 1="Stackpole Electronics Inc", Manufacturer Part Number 1=RNCP0603FTD1K00, Package=0603, Supplier Part Number 1=RNCP0603FTD1K00CT-ND, Mounting Type=SMD, Supplier 1=Digi-Key
R46 R47 R66 R81 R82 R83 R84: "RES 17.8K OHM 1% 1/10W 0603", Manufacturer 1=YAGEO, Manufacturer Part Number 1=RC0603FR-0717K8L, Supplier Part Number 1=311-17.8KHRCT-ND, Supplier 1=Digi-Key
R50 R59 R70 R71 R77 R78 R79 R102 R103 R104: "RES 10K OHM 1% 1/8W 0603", Manufacturer 1="Stackpole Electronics Inc", Manufacturer Part Number 1=RNCP0603FTD10K0, Package=0603, Supplier Part Number 1=RNCP0603FTD10K0CT-ND, Mounting Type=SMD, Supplier 1=Digi-Key
R51 R87 R88 R90: "RES 0 OHM JUMPER 1/10W 0603", Manufacturer 1=Yageo, Manufacturer Part Number 1=RC0603JR-070RL, Package=0603, Supplier Part Number 1=311-0.0GRCT-ND, Mounting Type=SMD, Supplier 1=Digi-Key
R52: "RES 604 OHM 1% 1/10W 0603", Manufacturer 1=Yageo, Manufacturer Part Number 1=RC0603FR-07604RL, Supplier Part Number 1=311-604HRCT-ND, Supplier 1=Digi-Key
R53: "RES 200 OHM 1% 1/10W 0603", Manufacturer 1=YAGEO, Manufacturer Part Number 1=RL0603FR-070R3L, Package=0603, Supplier Part Number 1=13-RL0603FR-070R3LCT-ND, Tolerance=1%, Supplier 1=Digi-Key
R56 R60 R72 R73: "RES SMD 1K OHM 1% 3W 2512", Manufacturer 1="TE Connectivity Passive Product", Manufacturer Part Number 1=35221K0FT, Package=2512, Supplier Part Number 1=A121161CT-ND, Mounting Type=SMD, Supplier 1=Digi-Key
R57 R64 R65 R85 R86 R91: "RES 33 OHM 1% 1/10W 0603", Manufacturer 1=Vishay, Manufacturer Part Number 1=CRCW060333R0FKEA, Package=0603, Supplier Part Number 1=541-33.0HCT-ND, Mounting Type=SMD, Supplier 1=Digi-Key
R58: "RES 100 OHM 1% 1/4W 1206", Manufacturer 1=YAGEO, Manufacturer Part Number 1=RC1206FR-07100RL, Package/Footprint=1206, Supplier Part Number 1=311-100FRCT-ND, Mounting Type=SMD, Supplier 1=Digi-Key
R63: "RES 1 mOHM 1% 3W 2512", Manufacturer 1=Riedon, Manufacturer Part Number 1=CSRL3-0R001F8, Package=2512, Supplier Part Number 1=696-1834-1-ND, Mounting Type=SMD, Supplier 1=Digi-Key